# Altium PCB Altium_v03_01_GLUE_LOGIC_4Plane.pcbdoc
Units mil, origin at the board's own origin, x right, y up, seen from the top; angles counter-clockwise.
Board outline 6299.21 x 6299.21 mil, 4 copper layers (Top Layer, GROUND, 5V, Bottom Layer); 46 components, 90 nets, 438 pads, 0 vias.
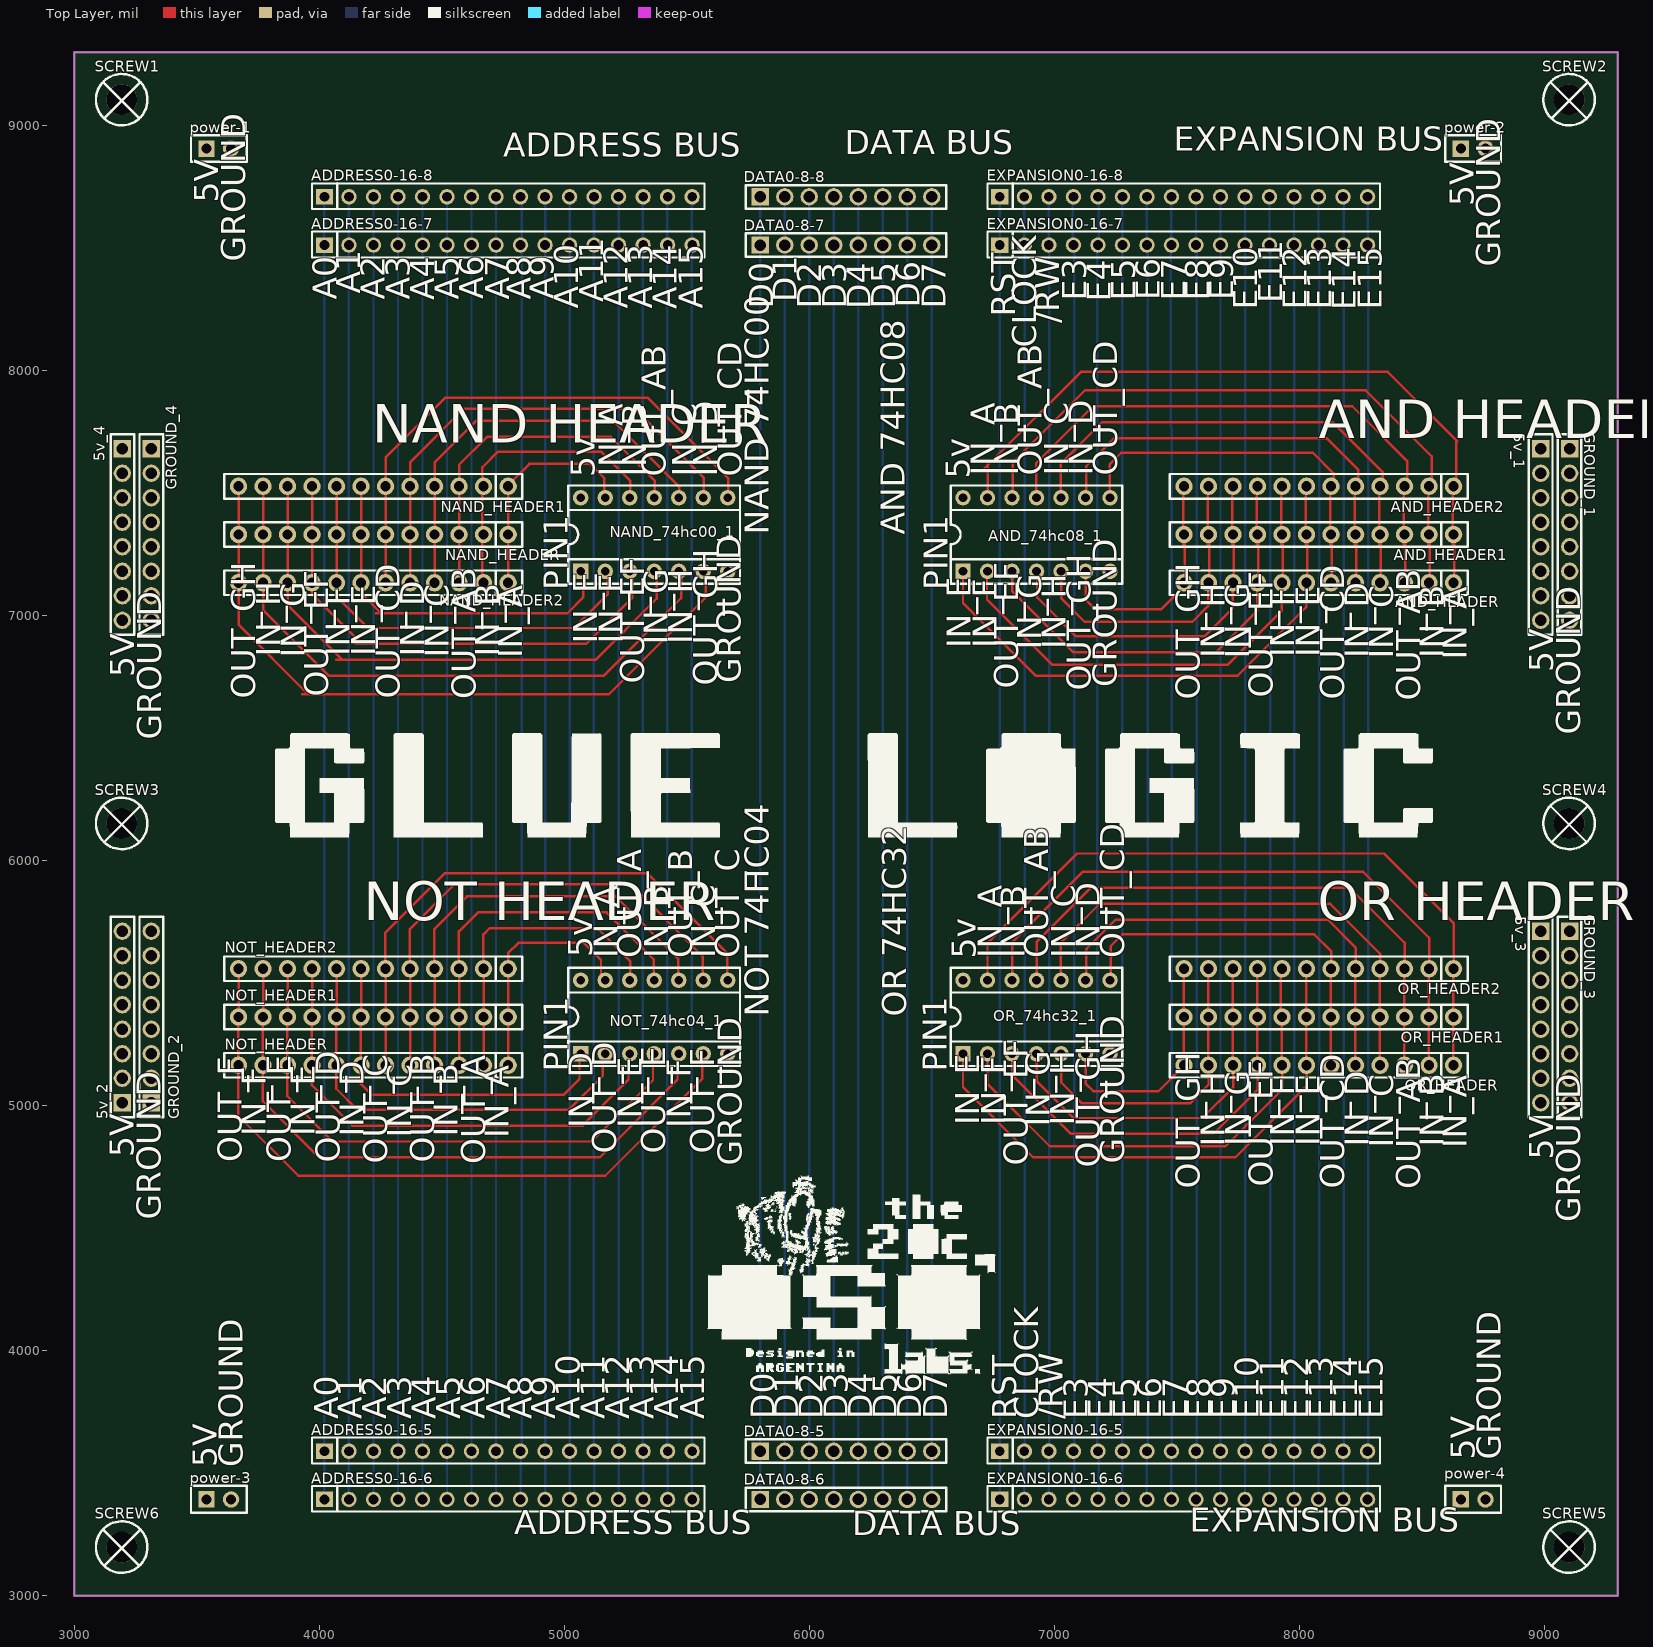
[diagram p0: Top Layer view]
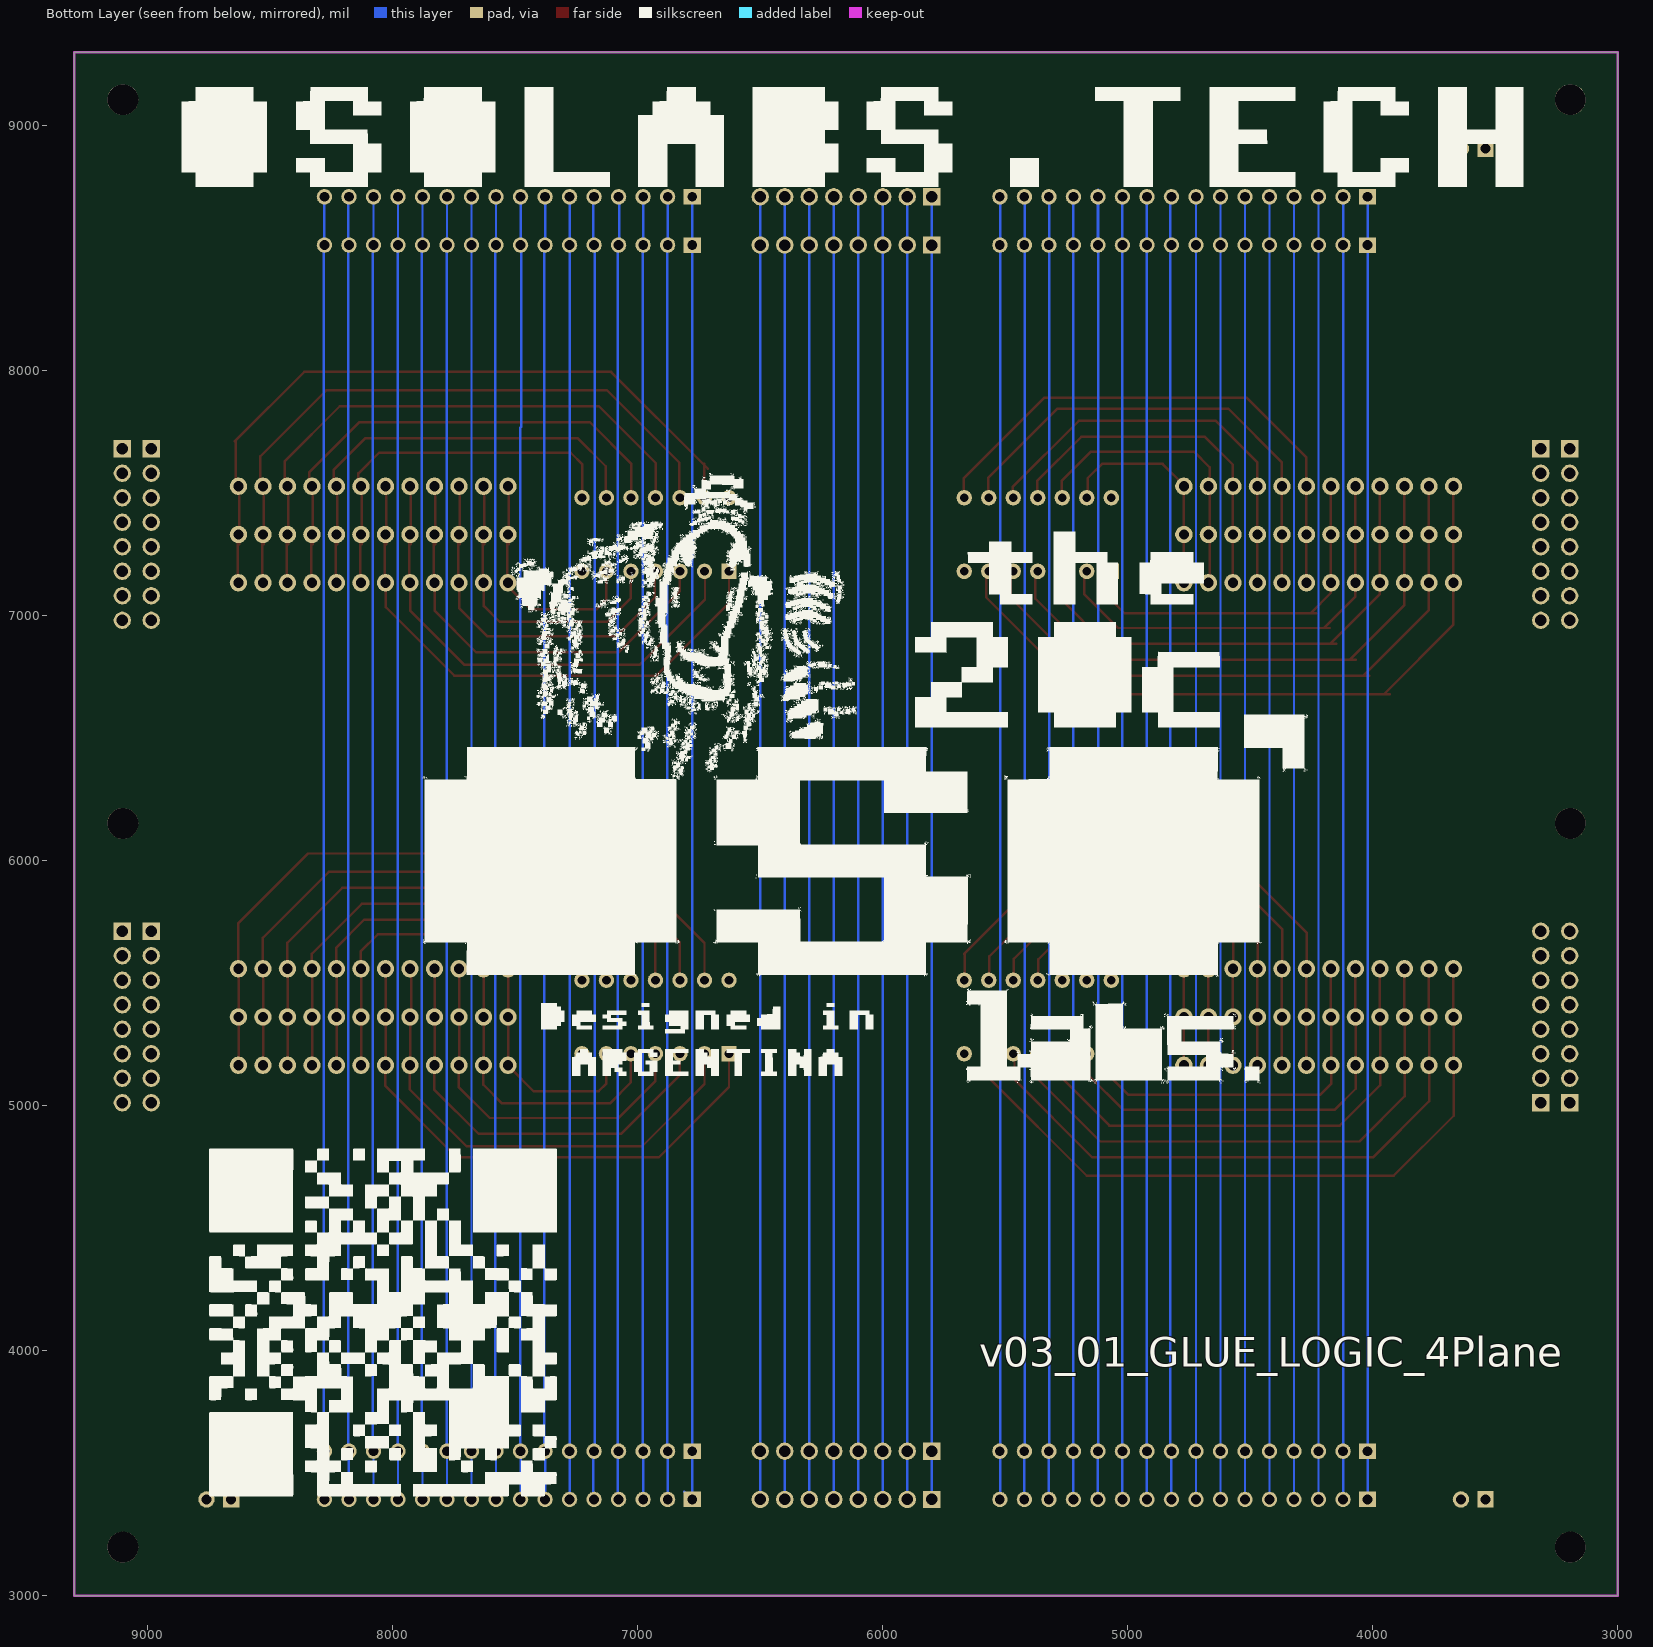
[diagram p1: Bottom Layer view, seen from below]
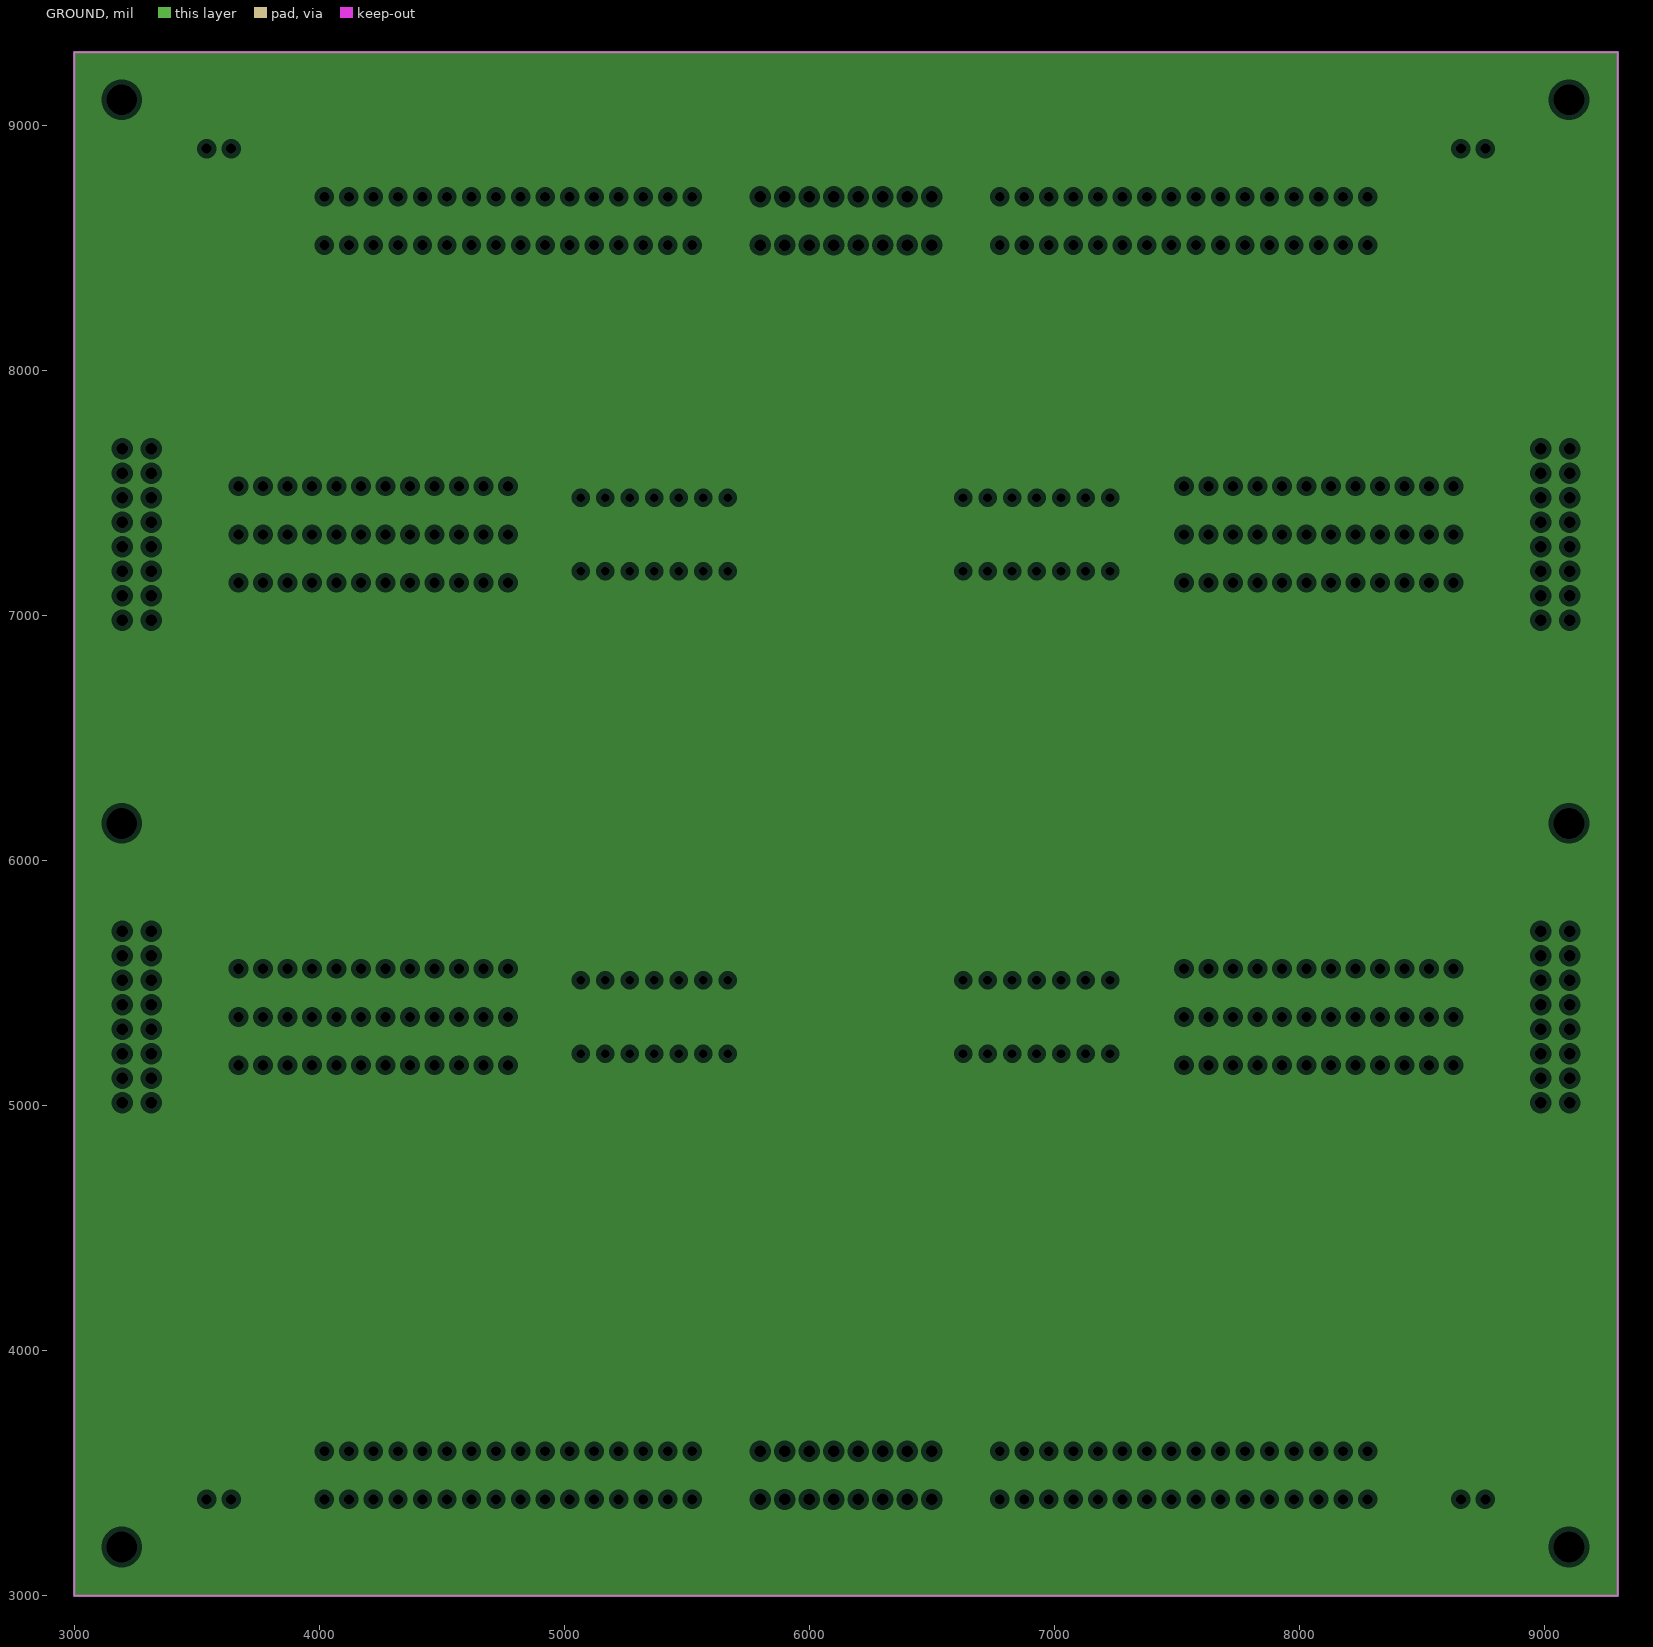
[diagram p2: GROUND, clearances drawn from the general rule]
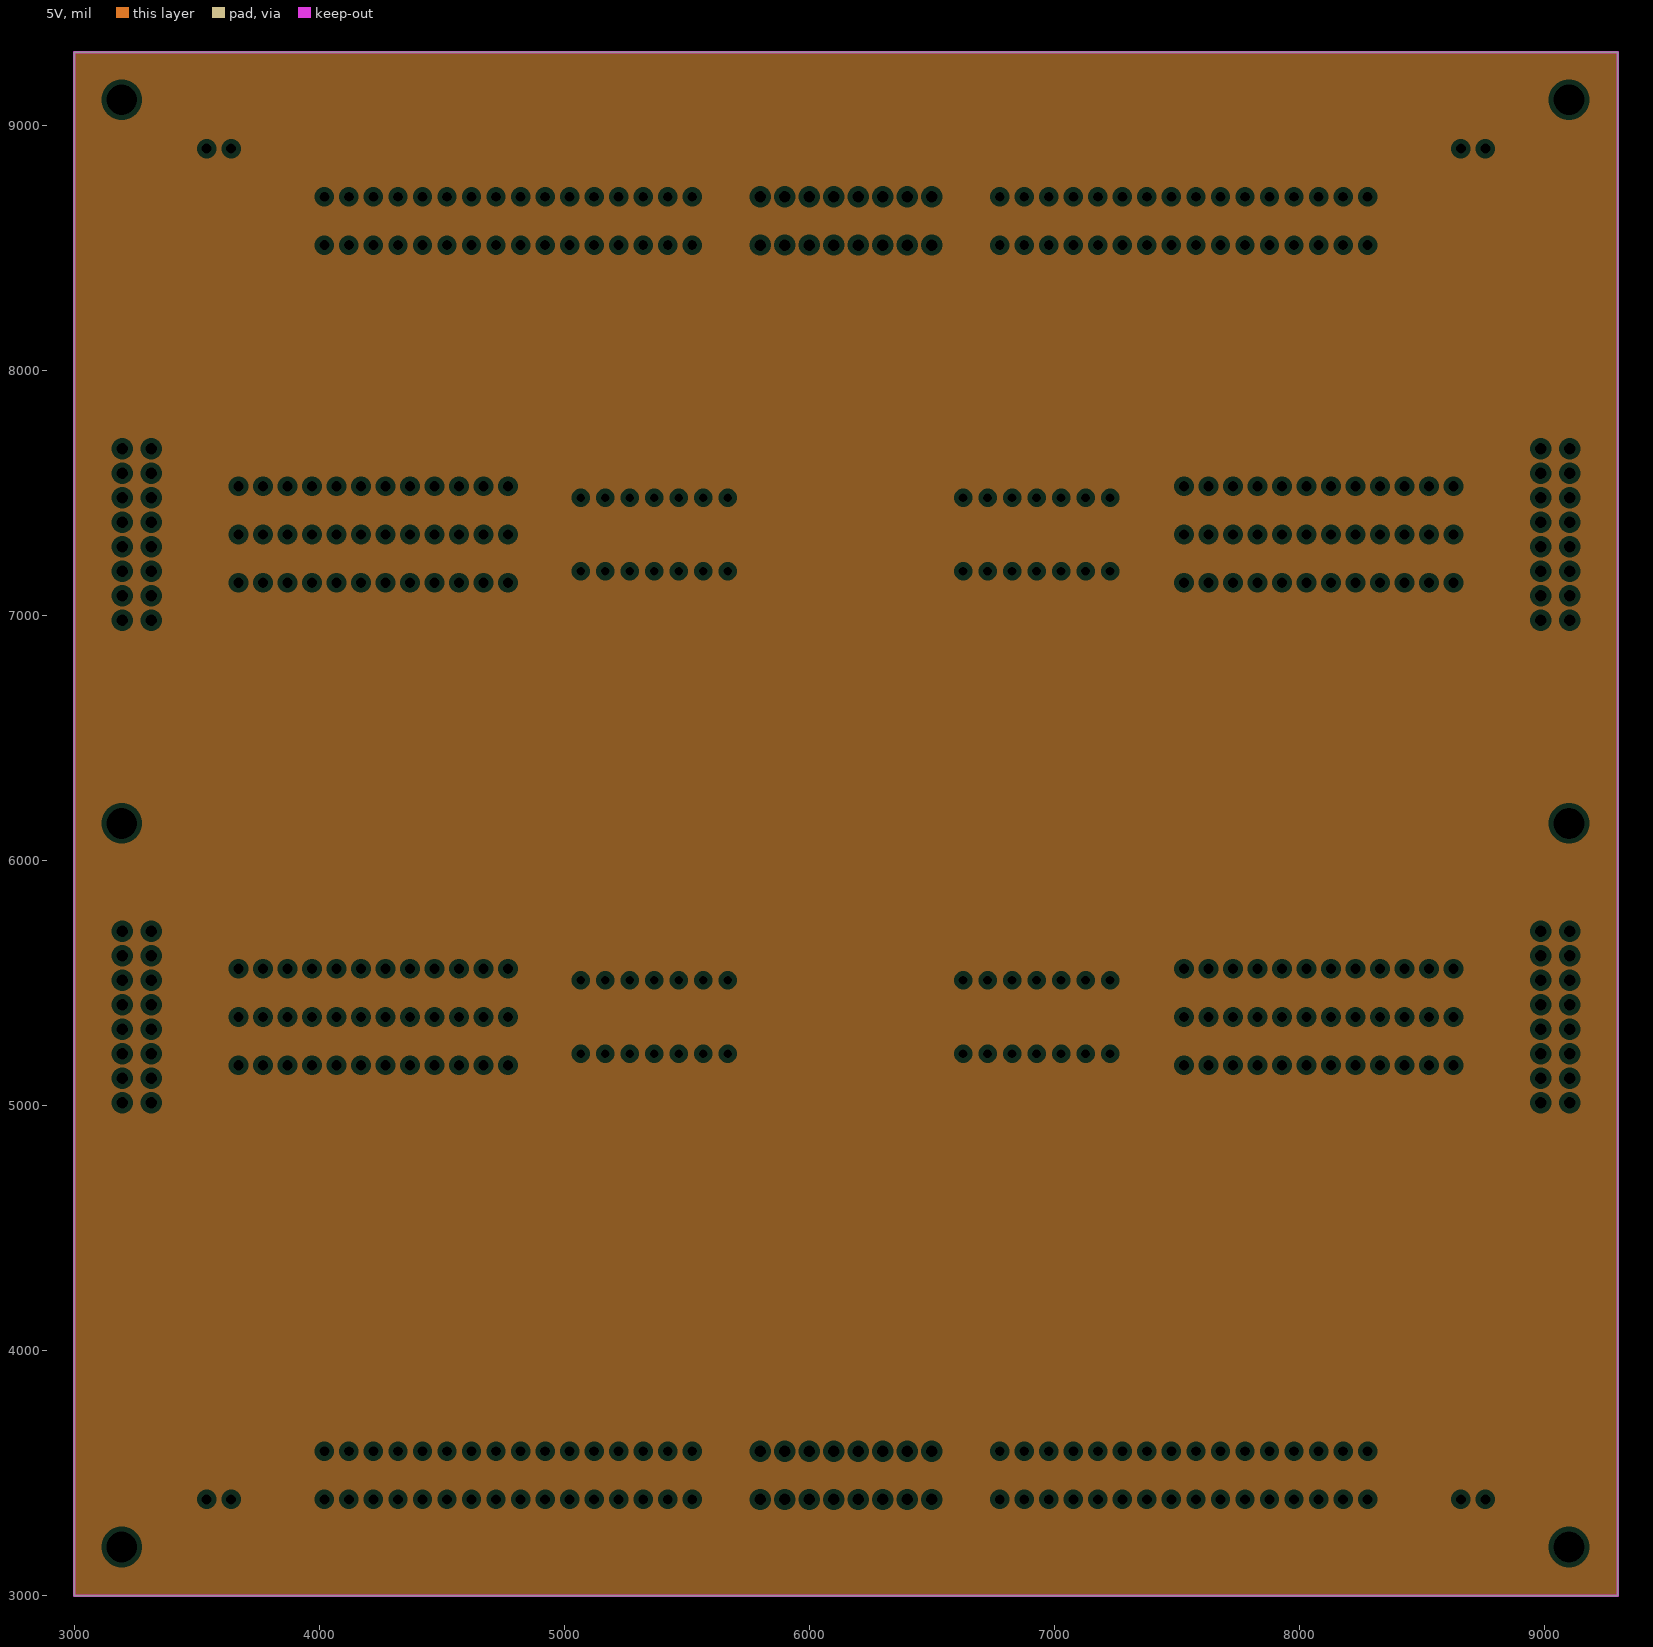
[diagram p3: 5V, clearances drawn from the general rule]

## Layer stack, top to bottom
Top Layer: signal copper (thickness not stored)
Dielectric: dielectric 12.6, FR-4, Dk 4.8
GROUND: plane copper (thickness not stored)
Dielectric: dielectric 12.6, FR-4, Dk 4.8
5V: plane copper (thickness not stored)
Dielectric: dielectric 12.6, FR-4, Dk 4.8
Bottom Layer: signal copper (thickness not stored)

## Board outline
3000,9299.21 9299.21,9299.21 9299.21,3000 3000,3000

## Design rules (kind name [scope] priority, off if disabled: settings)
BoardOutlineClearance copperThickness1oz [All] p0: genericclearance=10 ignorepadtopadclearanceinfootprint=FALSE except(0: Arc-SplitContinuation Track-SplitContinuation SMDPad-SplitContinuation THPad-SplitContinuation Via-SplitContinuation Fill-SplitContinuation Poly-SplitContinuation Region-SplitContinuation Text-SplitContinuation; 6: SMDPad-CutoutEdge THPad-CutoutEdge Via-CutoutEdge Fill-CutoutEdge Region-CutoutEdge; 11.8: Track-OutlineEdge SMDPad-OutlineEdge THPad-OutlineEdge Via-OutlineEdge Fill-OutlineEdge Region-OutlineEdge Poly-OutlineEdge Text-OutlineEdge Track-CutoutEdge)
BoardOutlineClearance copperThickness2oz [All] p0: genericclearance=10 ignorepadtopadclearanceinfootprint=FALSE except(0: Arc-SplitContinuation Track-SplitContinuation SMDPad-SplitContinuation THPad-SplitContinuation Via-SplitContinuation Fill-SplitContinuation Poly-SplitContinuation Region-SplitContinuation Text-SplitContinuation; 6: SMDPad-CutoutEdge THPad-CutoutEdge Via-CutoutEdge Fill-CutoutEdge Region-CutoutEdge; 11.8: Track-OutlineEdge SMDPad-OutlineEdge THPad-OutlineEdge Via-OutlineEdge Fill-OutlineEdge Region-OutlineEdge Poly-OutlineEdge Text-OutlineEdge Track-CutoutEdge)
Clearance copperThickness1oz [(InNet('A0') OR InNet('A1') OR InNet('A2') OR InNet('A3') OR InNet('A4') OR InNet('A5') OR InNet('A6') OR InNet('A7') OR InNet('A8') OR InNet('A9') OR InNet('A10') OR InNet('A11') OR InNet('A12') OR InNet('A13') OR InNet('A14') OR InNet('A15') OR InNet('RST') OR InNet('CLOCK') OR InNet('RW') OR InNet('E5') OR InNet('E6') OR InNet('E7') OR InNet('E8') OR InNet('E9') OR InNet('E10') OR InNet('E11') OR InNet('E12') OR InNet('E13') OR InNet('E14') OR InNet('E15') OR InNet('5V') OR InNet('GROUND') OR InNet('D0') OR InNet('D1') OR InNet('D2') OR InNet('D3') OR InNet('D4') OR InNet('D5') OR InNet('D6') OR InNet('D7') OR InNet('NAND_IN_E') OR InNet('NAND_IN_F') OR InNet('NAND_IN_H') OR InNet('NAND_OUT_GH') OR InNet('NAND_OUT_EF') OR InNet('NAND_IN_G') OR InNet('NAND_OUT_CD') OR InNet('NAND_IN_D') OR InNet('NAND_IN_C') OR InNet('NAND_OUT_AB') OR InNet('NAND_IN_B') OR InNet('NAND_IN_A') OR InNet('AND_IN_E') OR InNet('AND_IN_F') OR InNet('AND_IN_H') OR InNet('AND_OUT_GH') OR InNet('AND_OUT_EF') OR InNet('AND_IN_G') OR InNet('AND_OUT_CD') OR InNet('AND_IN_D') OR InNet('AND_IN_C') OR InNet('AND_OUT_AB') OR InNet('AND_IN_B') OR InNet('AND_IN_A') OR InNet('NOT_IN_D') OR InNet('NOT_OUT_D') OR InNet('NOT_IN_F') OR InNet('NOT_OUT_F') OR InNet('NOT_IN_E') OR InNet('NOT_OUT_E') OR InNet('NOT_OUT_C') OR InNet('NOT_IN_C') OR InNet('NOT_OUT_B') OR InNet('NOT_IN_B') OR InNet('NOT_OUT_A') OR InNet('NOT_IN_A') OR InNet('OR_IN_E') OR InNet('OR_IN_F') OR InNet('OR_IN_H') OR InNet('OR_OUT_GH') OR InNet('OR_OUT_EF') OR InNet('OR_IN_G') OR InNet('OR_OUT_CD') OR InNet('OR_IN_D') OR InNet('OR_IN_C') OR InNet('OR_OUT_AB') OR InNet('OR_IN_B') OR InNet('OR_IN_A') OR InNet('E3') OR InNet('E4'))] p1: gap=7 ignorepadtopadclearanceinfootprint=FALSE except(4: Track-Track; 6: Track-SMDPad SMDPad-SMDPad Track-THPad SMDPad-THPad THPad-THPad Track-Via SMDPad-Via THPad-Via Via-Via Track-Fill SMDPad-Fill THPad-Fill Via-Fill Fill-Fill SMDPad-Region THPad-Region Via-Region Fill-Region Region-Region Track-Poly SMDPad-Poly THPad-Poly Via-Poly Fill-Poly Poly-Poly Track-Text SMDPad-Text THPad-Text Via-Text Fill-Text Region-Text Poly-Text Text-Text Track-Hole SMDPad-Hole THPad-Hole Via-Hole Fill-Hole Region-Hole Poly-Hole Text-Hole; 11.8: Track-Region Region-Poly Track-Sheet SMDPad-Sheet THPad-Sheet Via-Sheet Fill-Sheet Region-Sheet Poly-Sheet Text-Sheet Sheet-Hole)
Clearance copperThickness2oz [All] p1: gap=7 ignorepadtopadclearanceinfootprint=FALSE except(6: Track-SMDPad SMDPad-SMDPad Track-THPad SMDPad-THPad THPad-THPad Track-Via SMDPad-Via THPad-Via Via-Via Track-Fill SMDPad-Fill THPad-Fill Via-Fill Fill-Fill SMDPad-Region THPad-Region Via-Region Fill-Region Region-Region Track-Poly SMDPad-Poly THPad-Poly Via-Poly Fill-Poly Poly-Poly Track-Text SMDPad-Text THPad-Text Via-Text Fill-Text Region-Text Poly-Text Text-Text Track-Hole SMDPad-Hole THPad-Hole Via-Hole Fill-Hole Region-Hole Poly-Hole Text-Hole; 8: Track-Track; 11.8: Track-Region Region-Poly Track-Sheet SMDPad-Sheet THPad-Sheet Via-Sheet Fill-Sheet Region-Sheet Poly-Sheet Text-Sheet Sheet-Hole)
DiffPairsRouting differentialPair [All] p1: maxuncoupledlength=10 minlimit=6 maxlimit=6 mostfreqgap=6 toplayer_minwidth=5 toplayer_prefwidth=10 toplayer_maxwidth=100 bottomlayer_minwidth=5 bottomlayer_prefwidth=10 bottomlayer_maxwidth=100
PasteMaskExpansion pasteMaskExpansion [All] p1: expansion=0
PlaneConnect innerPlane [All] p1: planeconnectstyle=Relief reliefexpansion=20 reliefentries=4 reliefconductorwidth=10 reliefairgap=10
PolygonConnect copperRegion [All] p1: connectstyle=Relief reliefentries=4 reliefconductorwidth=10 polygonreliefangle="90 Angle" airgapwidth=10
RoutingVias viaSize [All] p1: viastyle="Through Hole" holewidth=12.0078 minholewidth=11.811 maxholewidth=248.0314 width=24.0158 minwidth=19.685 maxwidth=393.7008
SolderMaskExpansion solderMaskExpansion [All] p1: useseparateexpansions=TRUE expansion=2 expansionbottom=2
Width copperThickness1oz [All] p1: maxlimit=100 minlimit=5 preferedwidth=10
Width copperThickness2oz [All] p1: maxlimit=100 minlimit=8 preferedwidth=10

## Components (designator, comment, footprint, x,y, rotation, side; value= is the part's Value field where it differs from the comment)
5v_1 "2.54-1*8P母环保" HDR-TH_8P-P2.54-V-F-1 8984.25,7330.71 r270 top
5v_2 "2.54-1*8P母环保" HDR-TH_8P-P2.54-V-F-1 3196.85,5362.2 r90 top
5v_3 "2.54-1*8P母环保" HDR-TH_8P-P2.54-V-F-1 8984.25,5362.2 r270 top
5v_4 "2.54-1*8P母环保" HDR-TH_8P-P2.54-V-F-1 3196.85,7330.71 r270 top
ADDRESS0-16-5 "PM254-1-16-Z-8.5" HDR-TH_16P-P2.54-V-F-A 4771.65,3590.55 r0 top
ADDRESS0-16-6 "PM254-1-16-Z-8.5" HDR-TH_16P-P2.54-V-F-A 4771.65,3393.7 r0 top
ADDRESS0-16-7 "PM254-1-16-Z-8.5" HDR-TH_16P-P2.54-V-F-A 4771.65,8511.81 r0 top
ADDRESS0-16-8 "PM254-1-16-Z-8.5" HDR-TH_16P-P2.54-V-F-A 4771.65,8708.66 r0 top
AND_74hc08_1 "IC-14P窄" DIP-14_L17.8-W10.2-P2.54-BL 6927.01,7330.71 r0 top
AND_HEADER "PM254-1-12-Z-8.5" HDR-TH_12P-P2.54-V-F 8078.74,7133.86 r180 top
AND_HEADER1 "PM254-1-12-Z-8.5" HDR-TH_12P-P2.54-V-F 8078.74,7330.71 r180 top
AND_HEADER2 "PM254-1-12-Z-8.5" HDR-TH_12P-P2.54-V-F 8078.74,7527.56 r180 top
DATA0-8-5 "2.54-1*8P母环保" HDR-TH_8P-P2.54-V-F-1 6149.61,3590.55 r0 top
DATA0-8-6 "2.54-1*8P母环保" HDR-TH_8P-P2.54-V-F-1 6149.61,3393.7 r0 top
DATA0-8-7 "2.54-1*8P母环保" HDR-TH_8P-P2.54-V-F-1 6149.61,8511.81 r0 top
DATA0-8-8 "2.54-1*8P母环保" HDR-TH_8P-P2.54-V-F-1 6149.61,8708.66 r0 top
EXPANSION0-16-5 "PM254-1-16-Z-8.5" HDR-TH_16P-P2.54-V-F-A 7527.56,3590.55 r0 top
EXPANSION0-16-6 "PM254-1-16-Z-8.5" HDR-TH_16P-P2.54-V-F-A 7527.56,3393.7 r0 top
EXPANSION0-16-7 "PM254-1-16-Z-8.5" HDR-TH_16P-P2.54-V-F-A 7527.56,8511.81 r0 top
EXPANSION0-16-8 "PM254-1-16-Z-8.5" HDR-TH_16P-P2.54-V-F-A 7527.56,8708.66 r0 top
GROUND_1 "2.54-1*8P母环保" HDR-TH_8P-P2.54-V-F-1 9102.36,7330.71 r270 top
GROUND_2 "2.54-1*8P母环保" HDR-TH_8P-P2.54-V-F-1 3314.96,5362.2 r90 top
GROUND_3 "2.54-1*8P母环保" HDR-TH_8P-P2.54-V-F-1 9102.36,5362.2 r270 top
GROUND_4 "2.54-1*8P母环保" HDR-TH_8P-P2.54-V-F-1 3314.96,7330.71 r270 top
NAND_74hc00_1 "IC-14P窄" DIP-14_L17.8-W10.2-P2.54-BL 5367.2,7330.71 r0 top
NAND_HEADER "PM254-1-12-Z-8.5" HDR-TH_12P-P2.54-V-F 4221.1,7330.71 r180 top
NAND_HEADER1 "PM254-1-12-Z-8.5" HDR-TH_12P-P2.54-V-F 4221.1,7527.56 r180 top
NAND_HEADER2 "PM254-1-12-Z-8.5" HDR-TH_12P-P2.54-V-F 4221.1,7133.86 r180 top
NOT_74hc04_1 "IC-14P窄" DIP-14_L17.8-W10.2-P2.54-BL 5367.2,5362.2 r0 top
NOT_HEADER "PM254-1-12-Z-8.5" HDR-TH_12P-P2.54-V-F 4221.1,5165.35 r180 top
NOT_HEADER1 "PM254-1-12-Z-8.5" HDR-TH_12P-P2.54-V-F 4221.1,5362.2 r180 top
NOT_HEADER2 "PM254-1-12-Z-8.5" HDR-TH_12P-P2.54-V-F 4221.1,5559.06 r180 top
OR_74hc32_1 "IC-14P窄" DIP-14_L17.8-W10.2-P2.54-BL 6927.01,5362.2 r0 top
OR_HEADER "PM254-1-12-Z-8.5" HDR-TH_12P-P2.54-V-F 8078.74,5165.35 r180 top
OR_HEADER1 "PM254-1-12-Z-8.5" HDR-TH_12P-P2.54-V-F 8078.74,5362.2 r180 top
OR_HEADER2 "PM254-1-12-Z-8.5" HDR-TH_12P-P2.54-V-F 8078.74,5559.06 r180 top
power-1 "2.54-1*2P母" HDR-TH_2P-P2.54-V-F 3590.55,8905.51 r0 top
power-2 "2.54-1*2P母" HDR-TH_2P-P2.54-V-F 8708.66,8905.51 r0 top
power-3 "2.54-1*2P母" HDR-TH_2P-P2.54-V-F 3590.55,3393.7 r0 top
power-4 "2.54-1*2P母" HDR-TH_2P-P2.54-V-F 8708.66,3393.7 r0 top
SCREW1 "Screw-Hole-M3" Screw-Hole-M3 3196.85,9102.36 r0 top
SCREW2 "Screw-Hole-M3" Screw-Hole-M3 9102.36,9102.36 r0 top
SCREW3 "Screw-Hole-M3" Screw-Hole-M3 3196.85,6149.61 r0 top
SCREW4 "Screw-Hole-M3" Screw-Hole-M3 9102.36,6149.61 r0 top
SCREW5 "Screw-Hole-M3" Screw-Hole-M3 9102.36,3196.85 r0 top
SCREW6 "Screw-Hole-M3" Screw-Hole-M3 3196.85,3196.85 r0 top

## Footprints (in the part's own frame and the unit in brackets; to place one, negate y for a bottom-side part, rotate by r counter-clockwise, add the part's x,y. Pads: shape width x height; smd on the part's side, far side on the other; paste and mask are expansions set on the pad)
DIP-14_L17.8-W10.2-P2.54-BL [mil]
  rect 63x63 hole 35.43: 1(-300,-150)
  round 63 hole 35.43: 2(-200,-150) 3(-100,-150) 4(0,-150) 5(100,-150) 6(200,-150) 7(300,-150) 8(300,150) 9(200,150) 10(100,150) 11(0,150) 12(-100,150) 13(-200,150) 14(-300,150)
  silkscreen extent -350,-200 350,200
HDR-TH_2P-P2.54-V-F [mm]
  rect 1.7x1.7 hole 1: 1(-1.27,0)
  round 1.7 hole 1: 2(1.27,0)
  silkscreen extent -2.88,-1.39 2.88,1.4
HDR-TH_8P-P2.54-V-F-1 [mm]
  rect 1.8x1.8 hole 1.2: 1(-8.89,0)
  round 1.8 hole 1.2: 2(-6.35,0) 3(-3.81,0) 4(-1.27,0) 5(1.27,0) 6(3.81,0) 7(6.35,0) 8(8.89,0)
  silkscreen extent -10.41,-1.22 10.41,1.22
HDR-TH_12P-P2.54-V-F [mm]
  round 1.8 hole 1.05: 1(-13.97,0) 2(-11.43,0) 3(-8.89,0) 4(-6.35,0) 5(-3.81,0) 6(-1.27,0) 7(1.27,0) 8(3.81,0) 9(6.35,0) 10(8.89,0) 11(11.43,0) 12(13.97,0)
  silkscreen extent -15.45,-1.27 15.45,1.27
HDR-TH_16P-P2.54-V-F-A [mm]
  rect 1.8x1.6 hole 1: 1(-19.05,0)
  round 1.6 hole 1: 2(-16.51,0) 3(-13.97,0) 4(-11.43,0) 5(-8.89,0) 6(-6.35,0) 7(-3.81,0) 8(-1.27,0) 9(1.27,0) 10(3.81,0) 11(6.35,0) 12(8.89,0) 13(11.43,0) 14(13.97,0) 15(16.51,0) 16(19.05,0)
  silkscreen extent -20.32,-1.27 20.32,1.4
Screw-Hole-M3 [mil]
  round 126 hole 126: 1(-2.5,2.5)
  silkscreen extent -107,-102 102,107

## Nets (pads, with @x,y where several pads share a name; then routed paths per layer and width w, separated by ;. In a path a pad name is that pad's centre, name@x,y a point inside that pad or via, vN(x,y) a via of type N, cw(c..) or ccw(c..) an arc to the next point about the centre after c; other vN are vias at no path point)
5V: 5v_1.1 5v_1.2 5v_1.3 5v_1.4 5v_1.5 5v_1.6 5v_1.7 5v_1.8 5v_2.1 5v_2.2 5v_2.3 5v_2.4 5v_2.5 5v_2.6 5v_2.7 5v_2.8 5v_3.1 5v_3.2 5v_3.3 5v_3.4 5v_3.5 5v_3.6 5v_3.7 5v_3.8 5v_4.1 5v_4.2 5v_4.3 5v_4.4 5v_4.5 5v_4.6 5v_4.7 5v_4.8 AND_74hc08_1.14 NAND_74hc00_1.14 NOT_74hc04_1.14 OR_74hc32_1.14 power-1.1 power-2.1 power-3.1 power-4.1
A0: ADDRESS0-16-5.1 ADDRESS0-16-6.1 ADDRESS0-16-7.1 ADDRESS0-16-8.1 | length 5315
  Bottom Layer w10: ADDRESS0-16-5.1@4020,3589.49 ADDRESS0-16-7.1@4020,8510.75 ; ADDRESS0-16-6.1 ADDRESS0-16-5.1 ; ADDRESS0-16-7.1 ADDRESS0-16-8.1
A1: ADDRESS0-16-5.2 ADDRESS0-16-6.2 ADDRESS0-16-7.2 ADDRESS0-16-8.2 | length 5307
  Bottom Layer w10: ADDRESS0-16-5.2@4120,3584.49 ADDRESS0-16-7.2@4120,8505.75 ; ADDRESS0-16-6.2 ADDRESS0-16-5.2@4121.65,3580.55 ; ADDRESS0-16-7.2 4121.65,8703.66 ADDRESS0-16-8.2@4126.65,8708.66
A2: ADDRESS0-16-5.3 ADDRESS0-16-6.3 ADDRESS0-16-7.3 ADDRESS0-16-8.3 | length 5315
  Bottom Layer w10: ADDRESS0-16-6.3 ADDRESS0-16-5.3 ADDRESS0-16-7.3 ADDRESS0-16-8.3
A3: ADDRESS0-16-5.4 ADDRESS0-16-6.4 ADDRESS0-16-7.4 ADDRESS0-16-8.4 | length 5317
  Bottom Layer w10: ADDRESS0-16-6.4 ADDRESS0-16-7.4 ADDRESS0-16-8.4@4321.65,8703.66 ; ADDRESS0-16-8.4 ADDRESS0-16-8.4@4326.65,8703.66
A4: ADDRESS0-16-5.5 ADDRESS0-16-6.5 ADDRESS0-16-7.5 ADDRESS0-16-8.5 | length 5315
  Bottom Layer w10: ADDRESS0-16-6.5 ADDRESS0-16-7.5 ADDRESS0-16-8.5
A5: ADDRESS0-16-5.6 ADDRESS0-16-6.6 ADDRESS0-16-7.6 ADDRESS0-16-8.6 | length 5317
  Bottom Layer w10: ADDRESS0-16-6.6 ADDRESS0-16-7.6 4521.65,8703.66 ADDRESS0-16-8.6@4526.65,8708.66
A6: ADDRESS0-16-5.7 ADDRESS0-16-6.7 ADDRESS0-16-7.7 ADDRESS0-16-8.7 | length 5315
  Bottom Layer w10: ADDRESS0-16-6.7 ADDRESS0-16-5.7 ADDRESS0-16-7.7 ADDRESS0-16-8.7
A7: ADDRESS0-16-5.8 ADDRESS0-16-6.8 ADDRESS0-16-7.8 ADDRESS0-16-8.8 | length 5317
  Bottom Layer w10: ADDRESS0-16-6.8 ADDRESS0-16-7.8 4721.65,8703.66 ADDRESS0-16-8.8@4726.65,8708.66
A8: ADDRESS0-16-5.9 ADDRESS0-16-6.9 ADDRESS0-16-7.9 ADDRESS0-16-8.9 | length 5317
  Bottom Layer w10: ADDRESS0-16-6.9 ADDRESS0-16-5.9@4821.65,3575.55 ; ADDRESS0-16-8.9 4826.65,8703.66 ADDRESS0-16-5.9@4826.65,3575.55
A9: ADDRESS0-16-5.10 ADDRESS0-16-6.10 ADDRESS0-16-7.10 ADDRESS0-16-8.10 | length 5306.8
  Bottom Layer w10: ADDRESS0-16-6.10 ADDRESS0-16-5.10@4921.65,3575.55 ; ADDRESS0-16-8.10 ADDRESS0-16-7.10 4921.65,3595.55 ADDRESS0-16-5.10@4930,3587.2
A10: ADDRESS0-16-5.11 ADDRESS0-16-6.11 ADDRESS0-16-7.11 ADDRESS0-16-8.11 | length 5315
  Bottom Layer w10: ADDRESS0-16-6.11 ADDRESS0-16-5.11 ADDRESS0-16-7.11 ADDRESS0-16-8.11
A11: ADDRESS0-16-5.12 ADDRESS0-16-6.12 ADDRESS0-16-7.12 ADDRESS0-16-8.12 | length 5515.7
  Bottom Layer w10: ADDRESS0-16-8.12@5120,8738.21 5120,3608.97 ADDRESS0-16-5.12@5121.93,3607.03 ; ADDRESS0-16-6.12 ADDRESS0-16-5.12@5121.65,3580.55 ; ADDRESS0-16-7.12 ADDRESS0-16-8.12
A12: ADDRESS0-16-5.13 ADDRESS0-16-6.13 ADDRESS0-16-7.13 ADDRESS0-16-8.13 | length 5283.7
  Bottom Layer w10: ADDRESS0-16-6.13@5220,3395.35 ADDRESS0-16-6.13 ADDRESS0-16-5.13 5221.65,8478.21 ; ADDRESS0-16-7.13 ADDRESS0-16-8.13
A13: ADDRESS0-16-5.14 ADDRESS0-16-6.14 ADDRESS0-16-7.14 ADDRESS0-16-8.14 | length 5311.7
  Bottom Layer w10: ADDRESS0-16-5.14@5321.65,3565.55 5321.65,3403.7 ADDRESS0-16-6.14@5331.65,3393.7 ; ADDRESS0-16-8.14@5326.65,8708.66 5320,8702.01 5320,3592.2 ADDRESS0-16-5.14@5331.65,3580.55
A14: ADDRESS0-16-5.15 ADDRESS0-16-6.15 ADDRESS0-16-7.15 ADDRESS0-16-8.15 | length 5316.6
  Bottom Layer w10: ADDRESS0-16-6.15 5421.65,3575.55 5419.72,3577.48 5419.72,8706.73 ADDRESS0-16-8.15
A15: ADDRESS0-16-5.16 ADDRESS0-16-6.16 ADDRESS0-16-7.16 ADDRESS0-16-8.16 | length 5316.3
  Bottom Layer w10: ADDRESS0-16-6.16 5520,3395.35 5520,8707.01 ADDRESS0-16-8.16
AND_IN_A: AND_74hc08_1.13 AND_HEADER1.1 AND_HEADER2.1 AND_HEADER.1 | length 2911.5
  Top Layer w10: AND_74hc08_1.13@6707.8,7492.72 6727.8,7512.72 6727.8,7614.21 ; 6712.8,7599.21 6727.8,7614.21 ; 6727.8,7619.21 6727.8,7614.21 ; 8626.1,7290.71 8626.1,7487.56 ; AND_HEADER.1@8631.1,7110.71 AND_HEADER1.1@8631.1,7307.56 ; AND_HEADER2.1@8638.9,7539.57 8638.9,7710.31 ; 8643.9,7710.31 8360,7994.21 7107.8,7994.21 6727.8,7614.21
AND_IN_B: AND_74hc08_1.12 AND_HEADER1.2 AND_HEADER2.2 AND_HEADER.2 | length 2587.6
  Top Layer w10: AND_74hc08_1.12@6807.8,7492.72 6830,7514.92 6830,7624.21 7125,7919.21 8270,7919.21 8538.9,7650.31 AND_HEADER2.2@8538.9,7539.57 ; 8526.1,7290.71 8526.1,7487.56 ; AND_HEADER.2@8531.1,7110.71 AND_HEADER1.2@8531.1,7307.56
AND_IN_C: AND_74hc08_1.10 AND_HEADER1.4 AND_HEADER2.4 AND_HEADER.4 | length 2041.8
  Top Layer w10: AND_74hc08_1.10@7007.8,7492.72 7025,7509.92 7025,7619.21 7195,7789.21 8135,7789.21 8338.9,7585.31 AND_HEADER2.4@8338.9,7539.57 ; 8326.1,7290.71 8326.1,7487.56 ; AND_HEADER.4@8331.1,7110.71 AND_HEADER1.4@8331.1,7307.56
AND_IN_D: AND_74hc08_1.9 AND_HEADER1.5 AND_HEADER2.5 AND_HEADER.5 | length 1785.1
  Top Layer w10: AND_74hc08_1.9@7107.8,7492.72 7130,7514.92 7130,7609.21 7245,7724.21 8110,7724.21 8238.9,7595.31 AND_HEADER2.5@8238.9,7539.57 ; 8226.1,7290.71 8226.1,7487.56 ; AND_HEADER.5@8231.1,7110.71 AND_HEADER1.5@8231.1,7307.56
AND_IN_E: AND_74hc08_1.1 AND_HEADER1.7 AND_HEADER2.7 AND_HEADER.7 | length 2244.3
  Top Layer w10: AND_74hc08_1.1 6627.01,7051 6923.05,6754.96 7748.05,6754.96 8026.95,7033.86 AND_HEADER.7@8026.95,7116.61 ; 8026.1,7290.71 8026.1,7487.56 ; AND_HEADER.7@8031.1,7110.71 AND_HEADER1.7@8031.1,7307.56
AND_IN_F: AND_74hc08_1.2 AND_HEADER1.8 AND_HEADER2.8 AND_HEADER.8 | length 2009.9
  Top Layer w10: AND_74hc08_1.2 6725,7178.7 6725,7065.81 6990.85,6799.96 7708.05,6799.96 7926.95,7018.86 AND_HEADER.8@7926.95,7116.61 ; 7926.1,7290.71 7926.1,7487.56 ; AND_HEADER.8@7931.1,7110.71 AND_HEADER1.8@7931.1,7307.56
AND_IN_G: AND_74hc08_1.4 AND_HEADER1.10 AND_HEADER2.10 AND_HEADER.10 | length 1500
  Top Layer w10: AND_74hc08_1.4 6930,7177.72 6930,7073.01 7088.05,6914.96 7613.05,6914.96 7726.95,7028.86 AND_HEADER.10@7726.95,7116.61 ; 7726.1,7290.71 7726.1,7487.56 ; AND_HEADER.10@7731.1,7110.71 AND_HEADER1.10@7731.1,7307.56
AND_IN_H: AND_74hc08_1.5 AND_HEADER1.11 AND_HEADER2.11 AND_HEADER.11 | length 1247.4
  Top Layer w10: AND_74hc08_1.5 7027.01,7071 7123.05,6974.96 7563.05,6974.96 7626.95,7038.86 AND_HEADER.11@7626.95,7116.61 ; 7626.1,7290.71 7626.1,7487.56 ; AND_HEADER.11@7631.1,7110.71 AND_HEADER1.11@7631.1,7307.56
AND_OUT_AB: AND_74hc08_1.11 AND_HEADER1.3 AND_HEADER2.3 AND_HEADER.3 | length 2323.3
  Top Layer w10: AND_74hc08_1.11@6907.8,7492.72 6925,7509.92 6925,7621.42 7157.8,7854.21 8215,7854.21 8438.9,7630.31 AND_HEADER2.3@8438.9,7539.57 ; 8426.1,7290.71 8426.1,7487.56 ; AND_HEADER.3@8431.1,7110.71 AND_HEADER1.3@8431.1,7307.56
AND_OUT_CD: AND_74hc08_1.8 AND_HEADER1.6 AND_HEADER2.6 AND_HEADER.6 | length 1533.7
  Top Layer w10: AND_74hc08_1.8@7207.8,7492.72 7225,7509.92 7225,7616.42 7272.8,7664.21 8055,7664.21 8138.9,7580.31 AND_HEADER2.6@8138.9,7539.57 ; 8126.1,7290.71 8126.1,7487.56 ; AND_HEADER.6@8131.1,7110.71 AND_HEADER1.6@8131.1,7307.56
AND_OUT_EF: AND_74hc08_1.3 AND_HEADER1.9 AND_HEADER2.9 AND_HEADER.9 | length 1745
  Top Layer w10: AND_74hc08_1.3 6827.01,7101 7078.05,6849.96 7658.05,6849.96 7826.95,7018.86 AND_HEADER.9@7826.95,7116.61 ; 7826.1,7290.71 7826.1,7487.56 ; AND_HEADER.9@7831.1,7110.71 AND_HEADER1.9@7831.1,7307.56
AND_OUT_GH: AND_74hc08_1.6 AND_HEADER1.12 AND_HEADER2.12 AND_HEADER.12 | length 963.3
  Top Layer w10: AND_74hc08_1.6 7127.01,7066 7168.05,7024.96 7435.3,7024.96 AND_HEADER.12@7526.95,7116.61 ; 7526.1,7290.71 7526.1,7487.56 ; AND_HEADER.12@7531.1,7110.71 AND_HEADER1.12@7531.1,7307.56
CLOCK: EXPANSION0-16-5.2 EXPANSION0-16-6.2 EXPANSION0-16-7.2 EXPANSION0-16-8.2 | length 5283.8
  Bottom Layer w10: EXPANSION0-16-6.2 EXPANSION0-16-5.2 ; EXPANSION0-16-8.2 EXPANSION0-16-7.2 6879.49,8509.88 6879.49,3622.48
D0: DATA0-8-5.1 DATA0-8-6.1 DATA0-8-7.1 DATA0-8-8.1 | length 5315
  Bottom Layer w10: DATA0-8-6.1 DATA0-8-5.1 DATA0-8-7.1 DATA0-8-8.1
D1: DATA0-8-5.2 DATA0-8-6.2 DATA0-8-7.2 DATA0-8-8.2 | length 5315
  Bottom Layer w10: DATA0-8-6.2 DATA0-8-5.2 DATA0-8-7.2 DATA0-8-8.2
D2: DATA0-8-5.3 DATA0-8-6.3 DATA0-8-7.3 DATA0-8-8.3 | length 5315
  Bottom Layer w10: DATA0-8-6.3 DATA0-8-5.3 DATA0-8-7.3 DATA0-8-8.3
D3: DATA0-8-5.4 DATA0-8-6.4 DATA0-8-7.4 DATA0-8-8.4 | length 5326.2
  Bottom Layer w10: DATA0-8-6.4@6091.65,3401.65 DATA0-8-6.4 DATA0-8-5.4 DATA0-8-7.4 DATA0-8-8.4
D4: DATA0-8-5.5 DATA0-8-6.5 DATA0-8-7.5 DATA0-8-8.5 | length 5315
  Bottom Layer w10: DATA0-8-6.5 DATA0-8-5.5 DATA0-8-7.5 DATA0-8-8.5
D5: DATA0-8-5.6 DATA0-8-6.6 DATA0-8-7.6 DATA0-8-8.6 | length 5326.2
  Bottom Layer w10: DATA0-8-6.6 DATA0-8-5.6 DATA0-8-7.6 DATA0-8-8.6 ; DATA0-8-6.6@6301.65,3401.65 DATA0-8-6.6@6309.61,3393.7
D6: DATA0-8-5.7 DATA0-8-6.7 DATA0-8-7.7 DATA0-8-8.7 | length 5315
  Bottom Layer w10: DATA0-8-6.7 DATA0-8-5.7 DATA0-8-7.7 DATA0-8-8.7
D7: DATA0-8-5.8 DATA0-8-6.8 DATA0-8-7.8 DATA0-8-8.8 | length 5315
  Bottom Layer w10: DATA0-8-6.8 DATA0-8-5.8 DATA0-8-7.8 DATA0-8-8.8
E3: EXPANSION0-16-5.4 EXPANSION0-16-6.4 EXPANSION0-16-7.4 EXPANSION0-16-8.4 | length 5315
  Bottom Layer w10: EXPANSION0-16-7.4@7075,8505.99 EXPANSION0-16-8.4@7075,8702.84 ; EXPANSION0-16-6.4@7080,3398 EXPANSION0-16-5.4@7080,3594.85 ; EXPANSION0-16-5.4@7080,3597.08 EXPANSION0-16-7.4@7080,8518.34
E4: EXPANSION0-16-5.5 EXPANSION0-16-6.5 EXPANSION0-16-7.5 EXPANSION0-16-8.5 | length 5315
  Bottom Layer w10: EXPANSION0-16-5.5@7175,3592.08 EXPANSION0-16-7.5@7175,8513.34 ; EXPANSION0-16-6.5@7180,3401.54 EXPANSION0-16-5.5@7180,3598.39 ; EXPANSION0-16-7.5@7180,8510.99 EXPANSION0-16-8.5@7180,8707.84
E5: EXPANSION0-16-5.6 EXPANSION0-16-6.6 EXPANSION0-16-7.6 EXPANSION0-16-8.6 | length 5315
  Bottom Layer w10: EXPANSION0-16-6.6 EXPANSION0-16-5.6 EXPANSION0-16-7.6 EXPANSION0-16-8.6
E6: EXPANSION0-16-5.7 EXPANSION0-16-6.7 EXPANSION0-16-7.7 EXPANSION0-16-8.7 | length 5329.5
  Bottom Layer w10: EXPANSION0-16-5.7@7360,3608.11 EXPANSION0-16-5.7 EXPANSION0-16-6.7 ; EXPANSION0-16-7.7@7360,8494.25 EXPANSION0-16-7.7 EXPANSION0-16-8.7 ; EXPANSION0-16-5.7@7380,3608.11 EXPANSION0-16-7.7@7380,8494.25
E7: EXPANSION0-16-5.8 EXPANSION0-16-6.8 EXPANSION0-16-7.8 EXPANSION0-16-8.8 | length 5317.7
  Bottom Layer w10: EXPANSION0-16-7.8@7472.56,8511.81 7475,8509.37 7475,7769.54 7478.35,7766.19 7478.35,3591.34 EXPANSION0-16-5.8 EXPANSION0-16-6.8 ; EXPANSION0-16-7.8 EXPANSION0-16-8.8
E8: EXPANSION0-16-5.9 EXPANSION0-16-6.9 EXPANSION0-16-7.9 EXPANSION0-16-8.9 | length 5283.4
  Bottom Layer w10: EXPANSION0-16-6.9 EXPANSION0-16-5.9 7580,3592.99 7580,8479.21 ; EXPANSION0-16-7.9 EXPANSION0-16-8.9
E9: EXPANSION0-16-5.10 EXPANSION0-16-6.10 EXPANSION0-16-7.10 EXPANSION0-16-8.10 | length 5315
  Bottom Layer w10: EXPANSION0-16-6.10 EXPANSION0-16-5.10 EXPANSION0-16-7.10 EXPANSION0-16-8.10
E10: EXPANSION0-16-5.11 EXPANSION0-16-6.11 EXPANSION0-16-7.11 EXPANSION0-16-8.11 | length 5315.6
  Bottom Layer w10: EXPANSION0-16-6.11 EXPANSION0-16-5.11 7778.35,3591.34 7778.35,8511.02 EXPANSION0-16-7.11 EXPANSION0-16-8.11
E11: EXPANSION0-16-5.12 EXPANSION0-16-6.12 EXPANSION0-16-7.12 EXPANSION0-16-8.12 | length 5317
  Bottom Layer w10: EXPANSION0-16-6.12 EXPANSION0-16-5.12 7880,3592.99 7880,8509.37 EXPANSION0-16-7.12 EXPANSION0-16-8.12
E12: EXPANSION0-16-5.13 EXPANSION0-16-6.13 EXPANSION0-16-7.13 EXPANSION0-16-8.13 | length 5315.6
  Bottom Layer w10: EXPANSION0-16-6.13 EXPANSION0-16-5.13 7978.35,3591.34 7978.35,8511.02 EXPANSION0-16-7.13 EXPANSION0-16-8.13
E13: EXPANSION0-16-5.14 EXPANSION0-16-6.14 EXPANSION0-16-7.14 EXPANSION0-16-8.14 | length 5283.4
  Bottom Layer w10: EXPANSION0-16-6.14 EXPANSION0-16-5.14 8080,3592.99 8080,8479.21 ; EXPANSION0-16-7.14 EXPANSION0-16-8.14
E14: EXPANSION0-16-5.15 EXPANSION0-16-6.15 EXPANSION0-16-7.15 EXPANSION0-16-8.15 | length 5317
  Bottom Layer w10: EXPANSION0-16-6.15 EXPANSION0-16-5.15 8180,3592.99 8180,8706.22 EXPANSION0-16-8.15
E15: EXPANSION0-16-5.16 EXPANSION0-16-6.16 EXPANSION0-16-7.16 EXPANSION0-16-8.16 | length 5284.6
  Bottom Layer w10: EXPANSION0-16-6.16 EXPANSION0-16-5.16 8280,3592.99 EXPANSION0-16-7.16@8280,8480.48 ; EXPANSION0-16-7.16 EXPANSION0-16-8.16
GROUND: AND_74hc08_1.7 GROUND_1.1 GROUND_1.2 GROUND_1.3 GROUND_1.4 GROUND_1.5 GROUND_1.6 GROUND_1.7 GROUND_1.8 GROUND_2.1 GROUND_2.2 GROUND_2.3 GROUND_2.4 GROUND_2.5 GROUND_2.6 GROUND_2.7 GROUND_2.8 GROUND_3.1 GROUND_3.2 GROUND_3.3 GROUND_3.4 GROUND_3.5 GROUND_3.6 GROUND_3.7 GROUND_3.8 GROUND_4.1 GROUND_4.2 GROUND_4.3 GROUND_4.4 GROUND_4.5 GROUND_4.6 GROUND_4.7 GROUND_4.8 NAND_74hc00_1.7 NOT_74hc04_1.7 OR_74hc32_1.7 power-1.2 power-2.2 power-3.2 power-4.2
NAND_IN_A: NAND_74hc00_1.13 NAND_HEADER1.1 NAND_HEADER2.1 NAND_HEADER.1 | length 939
  Top Layer w10: NAND_HEADER1.1@4766.1,7527.56 4857.76,7619.21 5105,7619.21 5163.43,7560.78 5163.43,7494.48 NAND_74hc00_1.13@5177.2,7480.71 ; NAND_HEADER2.1 NAND_HEADER.1 NAND_HEADER1.1
NAND_IN_B: NAND_74hc00_1.12 NAND_HEADER1.2 NAND_HEADER2.2 NAND_HEADER.2 | length 1214.4
  Top Layer w10: NAND_HEADER1.2@4665,7528.66 NAND_HEADER1.2@4666.1,7527.56 ; NAND_HEADER2.2@4666.1,7133.86 4666.1,7330.71 NAND_HEADER1.2@4666.1,7527.56 ; NAND_74hc00_1.12@5270,7487.91 5270,7549.21 5150,7669.21 4730,7669.21 4666.1,7605.31 NAND_HEADER1.2@4666.1,7527.56
NAND_IN_C: NAND_74hc00_1.10 NAND_HEADER1.4 NAND_HEADER2.4 NAND_HEADER.4 | length 1720.7
  Top Layer w10: NAND_HEADER2.4 NAND_HEADER.4 NAND_HEADER1.4 4471.1,7625.31 4640,7794.21 5200,7794.21 5470,7524.21 5470,7492.91 NAND_74hc00_1.10@5482.2,7480.71
NAND_IN_D: NAND_74hc00_1.9 NAND_HEADER1.5 NAND_HEADER2.5 NAND_HEADER.5 | length 1983.9
  Top Layer w10: NAND_HEADER2.5 NAND_HEADER.5 NAND_HEADER1.5 4371.1,7625.31 4590,7844.21 5287.2,7844.21 5570,7561.42 5570,7492.91 NAND_74hc00_1.9@5582.2,7480.71
NAND_IN_E: NAND_74hc00_1.1 NAND_HEADER1.7 NAND_HEADER2.7 NAND_HEADER.7 | length 1533.7
  Top Layer w10: NAND_HEADER1.7 NAND_HEADER.7 NAND_HEADER2.7 4171.1,7093.11 4255,7009.21 ; 4230,7009.21 4255,7009.21 ; NAND_74hc00_1.1@5077.2,7180.71 5077.2,7074.21 5012.2,7009.21 4255,7009.21
NAND_IN_F: NAND_74hc00_1.2 NAND_HEADER1.8 NAND_HEADER2.8 NAND_HEADER.8 | length 1785.1
  Top Layer w10: NAND_HEADER1.8 NAND_HEADER.8 NAND_HEADER2.8 4071.1,7078.11 4200,6949.21 ; 4175,6949.21 4200,6949.21 ; NAND_74hc00_1.2@5177.2,7180.71 5177.2,7086.42 5040,6949.21 4200,6949.21
NAND_IN_G: NAND_74hc00_1.4 NAND_HEADER1.10 NAND_HEADER2.10 NAND_HEADER.10 | length 2323.3
  Top Layer w10: NAND_HEADER1.10 NAND_HEADER.10 NAND_HEADER2.10 3871.1,7043.11 4095,6819.21 ; 4070,6819.21 4095,6819.21 ; NAND_74hc00_1.4@5377.2,7180.71 5377.2,7069.21 5127.2,6819.21 4095,6819.21
NAND_IN_H: NAND_74hc00_1.5 NAND_HEADER1.11 NAND_HEADER2.11 NAND_HEADER.11 | length 2587.6
  Top Layer w10: NAND_HEADER1.11 NAND_HEADER.11 NAND_HEADER2.11 3771.1,7023.11 4040,6754.21 ; 4015,6754.21 4040,6754.21 ; NAND_74hc00_1.5@5477.2,7180.71 5477.2,7071.42 5160,6754.21 4040,6754.21
NAND_OUT_AB: NAND_74hc00_1.11 NAND_HEADER1.3 NAND_HEADER2.3 NAND_HEADER.3 | length 1475.6
  Top Layer w10: NAND_HEADER2.3 NAND_HEADER.3 NAND_HEADER1.3 4571.1,7615.31 4685,7729.21 5190,7729.21 5370,7549.21 5370,7492.91 NAND_74hc00_1.11@5382.2,7480.71
NAND_OUT_CD: NAND_74hc00_1.8 NAND_HEADER1.6 NAND_HEADER2.6 NAND_HEADER.6 | length 2193.1
  Top Layer w10: NAND_HEADER2.6 NAND_HEADER.6 NAND_HEADER1.6 4271.1,7645.31 4515,7889.21 5340,7889.21 5670,7559.21 5670,7514.21
NAND_OUT_EF: NAND_74hc00_1.3 NAND_HEADER1.9 NAND_HEADER2.9 NAND_HEADER.9 | length 2041.8
  Top Layer w10: NAND_HEADER1.9 NAND_HEADER.9 NAND_HEADER2.9 3971.1,7088.11 4175,6884.21 ; 4150,6884.21 4175,6884.21 ; NAND_74hc00_1.3@5277.2,7180.71 5277.2,7071.42 5090,6884.21 4175,6884.21
NAND_OUT_GH: NAND_74hc00_1.6 NAND_HEADER1.12 NAND_HEADER2.12 NAND_HEADER.12 | length 2883.3
  Top Layer w10: NAND_HEADER1.12 NAND_HEADER.12 NAND_HEADER2.12 3671.1,6963.11 3955,6679.21 ; 3930,6679.21 3955,6679.21 ; NAND_74hc00_1.6@5577.2,7180.71 5577.2,7074.21 5182.2,6679.21 3955,6679.21
NOT_IN_A: NOT_74hc04_1.13 NOT_HEADER1.1 NOT_HEADER2.1 NOT_HEADER.1 | length 951.8
  Top Layer w10: NOT_HEADER.1 NOT_HEADER1.1 NOT_HEADER2.1 4771.1,5622.56 4812.76,5664.21 5080,5664.21 5150,5594.21 5150,5527.91 NOT_74hc04_1.13@5152.2,5525.71
NOT_IN_B: NOT_74hc04_1.11 NOT_HEADER1.3 NOT_HEADER2.3 NOT_HEADER.3 | length 1509.8
  Top Layer w10: NOT_HEADER.3@4571.1,5140.71 NOT_HEADER1.3@4571.1,5337.56 ; NOT_HEADER1.3@4571.1,5345.71 NOT_HEADER2.3@4571.1,5542.56 ; NOT_HEADER2.3 4570,5560.16 4570,5711.17 4648.04,5789.21 5173.04,5789.21 5365.24,5597.01 NOT_74hc04_1.11@5365.24,5540.71
NOT_IN_C: NOT_74hc04_1.9 NOT_HEADER1.5 NOT_HEADER2.5 NOT_HEADER.5 | length 2001.5
  Top Layer w10: NOT_HEADER.5 NOT_HEADER1.5 NOT_HEADER2.5@4371.1,5542.56 ; NOT_HEADER2.5 4370,5560.16 4370,5721.17 4553.04,5904.21 5270.24,5904.21 5565.24,5609.21 NOT_74hc04_1.9@5565.24,5540.71
NOT_IN_D: NOT_74hc04_1.1 NOT_HEADER1.7 NOT_HEADER2.7 NOT_HEADER.7 | length 1514.6
  Top Layer w10: NOT_HEADER1.7@4171.1,5345.71 NOT_HEADER1.7 ; NOT_HEADER2.7@4171.1,5542.56 NOT_HEADER1.7 ; NOT_74hc04_1.1@5062.2,5215.71 5062.2,5109.21 4997.2,5044.21 4215,5044.21 4170,5089.21 4170,5361.1 NOT_HEADER1.7
NOT_IN_E: NOT_74hc04_1.3 NOT_HEADER1.9 NOT_HEADER2.9 NOT_HEADER.9 | length 2022.7
  Top Layer w10: NOT_HEADER1.9@3971.1,5345.71 NOT_HEADER1.9 ; NOT_HEADER2.9@3971.1,5542.56 NOT_HEADER1.9 ; NOT_74hc04_1.3@5262.2,5215.71 5262.2,5106.42 5075,4919.21 4135,4919.21 3970,5084.21 3970,5361.1 NOT_HEADER1.9
NOT_IN_F: NOT_74hc04_1.5 NOT_HEADER1.11 NOT_HEADER2.11 NOT_HEADER.11 | length 2568.5
  Top Layer w10: NOT_HEADER1.11@3771.1,5345.71 NOT_HEADER1.11 ; NOT_HEADER2.11@3771.1,5542.56 NOT_HEADER1.11 ; NOT_74hc04_1.5@5462.2,5215.71 5462.2,5106.42 5145,4789.21 4000,4789.21 3770,5019.21 3770,5361.1 NOT_HEADER1.11
NOT_OUT_A: NOT_74hc04_1.12 NOT_HEADER1.2 NOT_HEADER2.2 NOT_HEADER.2 | length 1257.3
  Top Layer w10: NOT_HEADER.2@4671.1,5140.71 NOT_HEADER1.2@4671.1,5337.56 ; NOT_HEADER1.2@4671.1,5345.71 NOT_HEADER2.2@4671.1,5542.56 ; NOT_HEADER2.2 4670,5560.16 4670,5699.21 4695,5724.21 5135,5724.21 5270,5589.21 5270,5543.5 NOT_74hc04_1.12@5262.2,5535.71
NOT_OUT_B: NOT_74hc04_1.10 NOT_HEADER1.4 NOT_HEADER2.4 NOT_HEADER.4 | length 1770.6
  Top Layer w10: NOT_HEADER.4@4471.1,5145.71 NOT_HEADER1.4@4471.1,5342.56 ; NOT_HEADER1.4@4471.1,5345.71 NOT_HEADER2.4@4471.1,5542.56 ; NOT_HEADER2.4 4470,5560.16 4470,5721.17 4603.04,5854.21 5210,5854.21 5465.24,5598.97 NOT_74hc04_1.10@5465.24,5540.71
NOT_OUT_C: NOT_74hc04_1.8 NOT_HEADER1.6 NOT_HEADER2.6 NOT_HEADER.6 | length 2239.8
  Top Layer w10: NOT_HEADER.6 NOT_HEADER1.6 NOT_HEADER2.6@4271.1,5542.56 ; NOT_HEADER2.6 4270,5560.16 4270,5706.17 4513.04,5949.21 5338.04,5949.21 5668.04,5619.21 5665.24,5616.42 NOT_74hc04_1.8@5665.24,5540.71
NOT_OUT_D: NOT_74hc04_1.2 NOT_HEADER1.8 NOT_HEADER2.8 NOT_HEADER.8 | length 1752.4
  Top Layer w10: NOT_HEADER1.8@4066.1,5362.2 NOT_HEADER1.8@4070,5358.31 ; NOT_HEADER1.8@4070,5362.2 NOT_HEADER1.8@4070,5358.31 ; NOT_HEADER1.8 NOT_HEADER2.8@4071.1,5542.56 ; NOT_74hc04_1.2@5157.2,5215.71 5157.2,5121.42 5020,4984.21 4155,4984.21 4070,5069.21 NOT_HEADER1.8@4070,5358.31
NOT_OUT_E: NOT_74hc04_1.4 NOT_HEADER1.10 NOT_HEADER2.10 NOT_HEADER.10 | length 2304.2
  Top Layer w10: NOT_HEADER1.10@3871.1,5345.71 NOT_HEADER1.10 ; NOT_HEADER2.10@3871.1,5542.56 NOT_HEADER1.10 ; NOT_74hc04_1.4@5362.2,5215.71 5362.2,5104.21 5112.2,4854.21 4055,4854.21 3870,5039.21 3870,5361.1 NOT_HEADER1.10
NOT_OUT_F: NOT_74hc04_1.6 NOT_HEADER1.12 NOT_HEADER2.12 NOT_HEADER.12 | length 2864.1
  Top Layer w10: NOT_HEADER2.12 NOT_HEADER1.12 3670,5361.1 3670,4959.21 3915,4714.21 5167.2,4714.21 5562.2,5109.21 NOT_74hc04_1.6@5562.2,5215.71
OR_IN_A: OR_74hc32_1.13 OR_HEADER1.1 OR_HEADER2.1 OR_HEADER.1 | length 2886.7
  Top Layer w10: OR_74hc32_1.13 6727.01,5663.43 7092.8,6029.21 8345,6029.21 8628.9,5745.31 OR_HEADER2.1@8628.9,5574.57 ; OR_HEADER.1@8627.64,5176.85 OR_HEADER1.1@8627.64,5373.7 ; OR_HEADER1.1@8627.64,5386.85 OR_HEADER2.1@8627.64,5583.7
OR_IN_B: OR_74hc32_1.12 OR_HEADER1.2 OR_HEADER2.2 OR_HEADER.2 | length 2591
  Top Layer w10: OR_74hc32_1.12 6827.01,5666.22 7115,5954.21 8260,5954.21 8528.9,5685.31 OR_HEADER2.2@8528.9,5574.57 ; OR_HEADER.2@8527.64,5176.85 OR_HEADER1.2@8527.64,5373.7 ; OR_HEADER1.2@8527.64,5386.85 OR_HEADER2.2@8527.64,5583.7
OR_IN_C: OR_74hc32_1.10 OR_HEADER1.4 OR_HEADER2.4 OR_HEADER.4 | length 2046.9
  Top Layer w10: OR_74hc32_1.10 7025,5514.21 7025,5664.21 7185,5824.21 8125,5824.21 8328.9,5620.31 OR_HEADER2.4@8328.9,5574.57 ; OR_HEADER.4@8327.64,5176.85 OR_HEADER1.4@8327.64,5373.7 ; OR_HEADER1.4@8327.64,5386.85 OR_HEADER2.4@8327.64,5583.7
OR_IN_D: OR_74hc32_1.9 OR_HEADER1.5 OR_HEADER2.5 OR_HEADER.5 | length 1785.1
  Top Layer w10: OR_74hc32_1.9@7112.8,5527.72 7130,5544.92 7130,5639.21 7250,5759.21 8115,5759.21 8230,5644.21 8230,5588.46 OR_HEADER2.5@8243.9,5574.57 ; OR_HEADER.5@8227.64,5176.85 OR_HEADER1.5@8227.64,5373.7 ; OR_HEADER1.5@8227.64,5386.85 OR_HEADER2.5@8227.64,5583.7
OR_IN_E: OR_74hc32_1.1 OR_HEADER1.7 OR_HEADER2.7 OR_HEADER.7 | length 2247.4
  Top Layer w10: OR_74hc32_1.1 6627.01,5076 6913.05,4789.96 7738.05,4789.96 8030,5081.91 8030,5138.56 OR_HEADER.7@8016.95,5151.61 ; OR_HEADER.7@8027.64,5176.85 OR_HEADER1.7@8027.64,5373.7 ; OR_HEADER1.7@8027.64,5386.85 OR_HEADER2.7@8027.64,5583.7
OR_IN_F: OR_74hc32_1.2 OR_HEADER1.8 OR_HEADER2.8 OR_HEADER.8 | length 2011.1
  Top Layer w10: OR_74hc32_1.2 6727.01,5088.8 6980.85,4834.96 7698.05,4834.96 7929.57,5066.48 7929.57,5138.99 OR_HEADER.8@7916.95,5151.61 ; OR_HEADER1.8@7922.64,5386.85 OR_HEADER2.8@7922.64,5583.7 ; OR_HEADER.8@7927.64,5176.85 OR_HEADER1.8@7927.64,5373.7
OR_IN_G: OR_74hc32_1.4 OR_HEADER1.10 OR_HEADER2.10 OR_HEADER.10 | length 1503.2
  Top Layer w10: OR_74hc32_1.4 6927.01,5101 7078.05,4949.96 7603.05,4949.96 7730,5076.91 7730,5138.56 OR_HEADER.10@7716.95,5151.61 ; OR_HEADER.10@7727.64,5176.85 OR_HEADER1.10@7727.64,5373.7 ; OR_HEADER1.10@7727.64,5386.85 OR_HEADER2.10@7727.64,5583.7
OR_IN_H: OR_74hc32_1.5 OR_HEADER1.11 OR_HEADER2.11 OR_HEADER.11 | length 1250.2
  Top Layer w10: OR_74hc32_1.5 7027.01,5096 7113.05,5009.96 7553.05,5009.96 7629.6,5086.51 7629.6,5138.97 OR_HEADER.11@7616.95,5151.61 ; OR_HEADER.11@7627.64,5176.85 OR_HEADER1.11@7627.64,5373.7 ; OR_HEADER1.11@7627.64,5386.85 OR_HEADER2.11@7627.64,5583.7
OR_OUT_AB: OR_74hc32_1.11 OR_HEADER1.3 OR_HEADER2.3 OR_HEADER.3 | length 2326.8
  Top Layer w10: OR_74hc32_1.11 6927.01,5668.43 7147.8,5889.21 8205,5889.21 8428.9,5665.31 OR_HEADER2.3@8428.9,5574.57 ; OR_HEADER.3@8427.64,5176.85 OR_HEADER1.3@8427.64,5373.7 ; OR_HEADER1.3@8427.64,5386.85 OR_HEADER2.3@8427.64,5583.7
OR_OUT_CD: OR_74hc32_1.8 OR_HEADER1.6 OR_HEADER2.6 OR_HEADER.6 | length 1533.7
  Top Layer w10: OR_74hc32_1.8@7212.8,5527.72 7230,5544.92 7230,5651.42 7277.8,5699.21 8060,5699.21 8130,5629.21 8130,5588.46 OR_HEADER2.6@8143.9,5574.57 ; OR_HEADER.6@8127.64,5176.85 OR_HEADER1.6@8127.64,5373.7 ; OR_HEADER1.6@8127.64,5386.85 OR_HEADER2.6@8127.64,5583.7
OR_OUT_EF: OR_74hc32_1.3 OR_HEADER1.9 OR_HEADER2.9 OR_HEADER.9 | length 1748.2
  Top Layer w10: OR_74hc32_1.3 6827.01,5126 7068.05,4884.96 7648.05,4884.96 7830,5066.91 7830,5138.56 OR_HEADER.9@7816.95,5151.61 ; OR_HEADER.9@7827.64,5176.85 OR_HEADER1.9@7827.64,5373.7 ; OR_HEADER1.9@7827.64,5386.85 OR_HEADER2.9@7827.64,5583.7
OR_OUT_GH: OR_74hc32_1.6 OR_HEADER1.12 OR_HEADER2.12 OR_HEADER.12 | length 956.3
  Top Layer w10: OR_74hc32_1.6 7127.01,5091 7158.8,5059.21 7424.55,5059.21 OR_HEADER.12@7516.95,5151.61 ; OR_HEADER.12@7527.64,5176.85 OR_HEADER1.12@7527.64,5373.7 ; OR_HEADER1.12@7527.64,5386.85 OR_HEADER2.12@7527.64,5583.7
RST: EXPANSION0-16-5.1 EXPANSION0-16-6.1 EXPANSION0-16-7.1 EXPANSION0-16-8.1 | length 5360.1
  Bottom Layer w10: EXPANSION0-16-8.1 EXPANSION0-16-7.1 EXPANSION0-16-5.1 EXPANSION0-16-6.1 6809.49,3425.63
RW: EXPANSION0-16-5.3 EXPANSION0-16-6.3 EXPANSION0-16-7.3 EXPANSION0-16-8.3 | length 5283.8
  Bottom Layer w10: EXPANSION0-16-6.3 EXPANSION0-16-5.3 ; EXPANSION0-16-8.3 EXPANSION0-16-7.3 6979.49,8509.88 6979.49,3622.48
pads on no net: SCREW1.1 SCREW2.1 SCREW3.1 SCREW4.1 SCREW5.1 SCREW6.1

## Keep-outs
Board Outline Layer:
  the board outline again, w10

## Silkscreen, mask and mechanical layers (free items; w line width, h text height)
Top Silkscreen Layer:
  drawing of 2972 lines, arcs and shapes, not listed
  text "EXPANSION BUS" at 7487.56,8896.85 h98.43
  text "DATA BUS" at 6144.61,8881.85 h98.43
  text "ADDRESS BUS" at 4751.65,8871.85 h98.43
  text "5V" at 3589.21,8683.41 h98.43 r90
  text "5V" at 8710,8669.21 h98.43 r90
  text "GROUND" at 3699.21,8443.41 h98.43 r90
  text "GROUND" at 8820,8424.21 h98.43 r90
  text "A1" at 4167.38,8313.89 h98.43 r90
  text "A6" at 4669.88,8291.29 h98.43 r90
  text "A9" at 4957.38,8291.29 h98.43 r90
  text "A0" at 4072.38,8288.49 h98.43 r90
  text "A2" at 4267.38,8288.49 h98.43 r90
  text "A3" at 4369.88,8288.49 h98.43 r90
  text "A5" at 4569.88,8288.49 h98.43 r90
  text "A7" at 4774.88,8288.49 h98.43 r90
  text "A8" at 4862.38,8288.49 h98.43 r90
  text "E6" at 7429.88,8286.89 h98.43 r90
  text "E9" at 7729.42,8286.89 h98.43 r90
  text "A4" at 4469.88,8285.69 h98.43 r90
  text "E3" at 7129.42,8284.09 h98.43 r90
  text "E5" at 7329.88,8284.09 h98.43 r90
  text "E7" at 7534.42,8284.09 h98.43 r90
  text "E8" at 7632.38,8284.09 h98.43 r90
  text "E4" at 7229.88,8281.29 h98.43 r90
  text "A11" at 5159.88,8278.19 h98.43 r90
  text "D1" at 5948.63,8277.69 h98.43 r90
  text "E11" at 7929.88,8273.79 h98.43 r90
  text "D6" at 6451.13,8255.09 h98.43 r90
  text "A10" at 5057.38,8252.79 h98.43 r90
  text "A12" at 5259.88,8252.79 h98.43 r90
  text "A13" at 5359.88,8252.79 h98.43 r90
  text "A15" at 5564.88,8252.79 h98.43 r90
  text "D0" at 5853.63,8252.29 h98.43 r90
  text "D2" at 6048.63,8252.29 h98.43 r90
  text "D3" at 6151.13,8252.29 h98.43 r90
  text "D5" at 6351.13,8252.29 h98.43 r90
  text "D7" at 6556.13,8252.29 h98.43 r90
  text "A14" at 5459.88,8249.99 h98.43 r90
  text "D4" at 6251.13,8249.49 h98.43 r90
  text "E10" at 7827.38,8248.39 h98.43 r90
  text "E12" at 8029.88,8248.39 h98.43 r90
  text "E13" at 8129.88,8248.39 h98.43 r90
  text "E15" at 8334.88,8248.39 h98.43 r90
  text "E14" at 8229.88,8245.59 h98.43 r90
  text "RST" at 6840,8220.09 h98.43 r90
  text "/RW" at 7020,8191.79 h98.43 r90
  text "CLOCK" at 6925,8092.19 h98.43 r90
  text "AND HEADER" at 8079.37,7724.41 h157.48
  text "NAND HEADER" at 4216.1,7704.41 h157.48
  text "IN_A" at 6757.32,7571.14 h98.43 r90
  text "IN_B" at 6852.32,7571.14 h98.43 r90
  text "OUT_AB" at 6947.32,7571.14 h98.43 r90
  text "IN_C" at 7057.21,7571.14 h98.43 r90
  text "IN_D" at 7157.21,7571.14 h98.43 r90
  text "OUT_CD" at 7257.32,7571.14 h98.43 r90
  text "IN_A" at 5239.21,7566.36 h98.43 r90
  text "IN_B" at 5334.21,7566.36 h98.43 r90
  text "OUT_AB" at 5414.21,7566.36 h98.43 r90
  text "IN_C" at 5539.1,7566.36 h98.43 r90
  text "IN_D" at 5624.1,7566.36 h98.43 r90
  text "OUT_CD" at 5724.21,7566.36 h98.43 r90
  text "5v" at 5125,7564.21 h98.43 r90
  text "5v" at 6654.21,7557.66 h98.43 r90
  text "NAND 74HC00" at 5834.65,7330.71 h98.43 r90
  text "AND 74HC08" at 6389.57,7330.71 h98.43 r90
  text "PIN1" at 5015,7104.21 h98.43 r90
  text "PIN1" at 6565,7104.21 h98.43 r90
  text "IN_E" at 5134.21,6885.81 h98.43 r90
  text "IN_F" at 5239.21,6885.81 h98.43 r90
  text "IN_H" at 5521.71,6883.01 h98.43 r90
  text "IN_G" at 5421.71,6880.21 h98.43 r90
  text "IN_E" at 6659.21,6865.81 h98.43 r90
  text "IN_F" at 6764.21,6865.81 h98.43 r90
  text "IN_H" at 7046.71,6863.01 h98.43 r90
  text "IN_G" at 6946.71,6860.21 h98.43 r90
  text "IN_F" at 4124.49,6834.06 h98.43 r90
  text "IN_E" at 4229.49,6834.06 h98.43 r90
  text "IN_H" at 3841.99,6831.26 h98.43 r90
  text "IN_D" at 4429.49,6831.26 h98.43 r90
  text "IN_B" at 4734.37,6831.26 h98.43 r90
  text "IN_F" at 7977.76,6829.06 h98.43 r90
  text "IN_E" at 8082.76,6829.06 h98.43 r90
  text "IN_G" at 3941.99,6828.46 h98.43 r90
  text "IN_C" at 4529.49,6828.46 h98.43 r90
  text "IN_A" at 4829.37,6825.56 h98.43 r90
  text "IN_H" at 7695.26,6826.26 h98.43 r90
  text "IN_D" at 8282.76,6826.26 h98.43 r90
  text "IN_B" at 8587.64,6826.26 h98.43 r90
  text "IN_G" at 7795.26,6823.46 h98.43 r90
  text "IN_C" at 8382.76,6823.46 h98.43 r90
  text "IN_A" at 8682.64,6820.56 h98.43 r90
  text "5V" at 9035,6769.21 h98.43 r90
  text "5V" at 3245,6749.21 h98.43 r90
  text "GROUND" at 5719.21,6723.41 h98.43 r90
  text "OUT_EF" at 5326.71,6721.21 h98.43 r90
  text "OUT_GH" at 5624.21,6712.81 h98.43 r90
  text "GROUND" at 7254.21,6708.41 h98.43 r90
  text "OUT_EF" at 6851.71,6701.21 h98.43 r90
  text "OUT_GH" at 7149.21,6692.81 h98.43 r90
  text "OUT_EF" at 4036.99,6669.46 h98.43 r90
  text "OUT_EF" at 7890.26,6664.46 h98.43 r90
  text "OUT_GH" at 3739.49,6661.06 h98.43 r90
  text "OUT_CD" at 4329.37,6661.06 h98.43 r90
  text "OUT_AB" at 4639.37,6658.16 h98.43 r90
  text "OUT_GH" at 7592.76,6656.06 h98.43 r90
  text "OUT_CD" at 8182.64,6656.06 h98.43 r90
  text "OUT_AB" at 8492.64,6653.16 h98.43 r90
  text "GROUND" at 9145,6514.21 h98.43 r90
  text "GROUND" at 3355,6494.21 h98.43 r90
  text "NOT HEADER" at 4181.1,5755.91 h157.48
  text "OR HEADER" at 8074.37,5755.91 h157.48
  text "5v" at 5114.21,5605.06 h98.43 r90
  text "IN_A" at 5217.32,5601.91 h98.43 r90
  text "OUT_A" at 5315,5601.91 h98.43 r90
  text "IN_B" at 5425.37,5601.91 h98.43 r90
  text "OUT_B" at 5523.05,5601.91 h98.43 r90
  text "IN_C" at 5615.37,5601.91 h98.43 r90
  text "OUT_C" at 5713.05,5601.91 h98.43 r90
  text "IN_A" at 6784.21,5601.36 h98.43 r90
  text "IN_B" at 6879.21,5601.36 h98.43 r90
  text "OUT_AB" at 6974.21,5601.36 h98.43 r90
  text "IN_C" at 7084.1,5601.36 h98.43 r90
  text "IN_D" at 7184.1,5601.36 h98.43 r90
  text "OUT_CD" at 7284.21,5601.36 h98.43 r90
  text "5v" at 6680,5599.21 h98.43 r90
  text "NOT 74HC04" at 5834.65,5362.2 h98.43 r90
  text "OR 74HC32" at 6394.57,5362.2 h98.43 r90
  text "PIN1" at 5015,5139.21 h98.43 r90
  text "PIN1" at 6560,5139.21 h98.43 r90
  text "IN_E" at 6694.21,4920.81 h98.43 r90
  text "IN_F" at 6799.21,4920.81 h98.43 r90
  text "IN_H" at 7081.71,4918.01 h98.43 r90
  text "IN_G" at 6981.71,4915.21 h98.43 r90
  text "IN_D" at 5115.37,4909.09 h98.43 r90
  text "IN_E" at 5315.37,4909.09 h98.43 r90
  text "IN_F" at 5515.37,4909.09 h98.43 r90
  text "IN_F" at 3781.32,4875.56 h98.43 r90
  text "IN_E" at 3981.32,4875.56 h98.43 r90
  text "IN_D" at 4181.32,4872.76 h98.43 r90
  text "IN_B" at 4566.32,4872.76 h98.43 r90
  text "IN_C" at 4376.32,4869.96 h98.43 r90
  text "IN_A" at 4774.37,4867.06 h98.43 r90
  text "IN_F" at 7978.41,4834.76 h98.43 r90
  text "IN_E" at 8083.41,4834.76 h98.43 r90
  text "IN_G" at 7795,4834.21 h98.43 r90
  text "IN_H" at 7695.91,4831.96 h98.43 r90
  text "IN_D" at 8283.41,4831.96 h98.43 r90
  text "IN_B" at 8588.29,4831.96 h98.43 r90
  text "IN_C" at 8383.41,4829.16 h98.43 r90
  text "IN_A" at 8683.29,4826.26 h98.43 r90
  text "OUT_D" at 5213.05,4804.76 h98.43 r90
  text "OUT_E" at 5413.05,4804.76 h98.43 r90
  text "OUT_F" at 5613.05,4804.76 h98.43 r90
  text "5V" at 3244.21,4789.51 h98.43 r90
  text "5V" at 9035,4779.21 h98.43 r90
  text "OUT_F" at 3683.64,4769.26 h98.43 r90
  text "OUT_E" at 3883.64,4769.26 h98.43 r90
  text "OUT_D" at 4083.64,4766.46 h98.43 r90
  text "OUT_B" at 4468.64,4766.46 h98.43 r90
  text "OUT_C" at 4278.64,4763.66 h98.43 r90
  text "GROUND" at 7284.21,4763.41 h98.43 r90
  text "OUT_A" at 4676.69,4760.76 h98.43 r90
  text "OUT_EF" at 6891.71,4756.21 h98.43 r90
  text "GROUND" at 5725,4754.21 h98.43 r90
  text "OUT_GH" at 7184.21,4747.81 h98.43 r90
  text "OUT_EF" at 7890.91,4670.16 h98.43 r90
  text "OUT_GH" at 7593.41,4661.76 h98.43 r90
  text "OUT_CD" at 8183.29,4661.76 h98.43 r90
  text "OUT_AB" at 8493.29,4658.86 h98.43 r90
  text "GROUND" at 3354.21,4534.51 h98.43 r90
  text "GROUND" at 9145,4524.21 h98.43 r90
  text "A0" at 4077.96,3720.16 h98.43 r90
  text "A1" at 4172.96,3720.16 h98.43 r90
  text "A2" at 4272.96,3720.16 h98.43 r90
  text "A3" at 4375.46,3720.16 h98.43 r90
  text "A4" at 4475.46,3720.16 h98.43 r90
  text "A5" at 4575.46,3720.16 h98.43 r90
  text "A6" at 4675.46,3720.16 h98.43 r90
  text "A7" at 4780.46,3720.16 h98.43 r90
  text "A8" at 4867.96,3720.16 h98.43 r90
  text "A9" at 4962.96,3720.16 h98.43 r90
  text "A10" at 5062.96,3720.16 h98.43 r90
  text "A11" at 5165.46,3720.16 h98.43 r90
  text "A12" at 5265.46,3720.16 h98.43 r90
  text "A13" at 5365.46,3720.16 h98.43 r90
  text "A14" at 5465.46,3720.16 h98.43 r90
  text "A15" at 5570.46,3720.16 h98.43 r90
  text "D0" at 5859.21,3720.16 h98.43 r90
  text "D1" at 5954.21,3720.16 h98.43 r90
  text "D2" at 6054.21,3720.16 h98.43 r90
  text "D3" at 6156.71,3720.16 h98.43 r90
  text "D4" at 6256.71,3720.16 h98.43 r90
  text "D5" at 6356.71,3720.16 h98.43 r90
  text "D6" at 6456.71,3720.16 h98.43 r90
  text "D7" at 6561.71,3720.16 h98.43 r90
  text "RST" at 6845,3720.16 h98.43 r90
  text "CLOCK" at 6935,3720.16 h98.43 r90
  text "/RW" at 7032.96,3720.16 h98.43 r90
  text "E3" at 7135,3720.16 h98.43 r90
  text "E4" at 7235.46,3720.16 h98.43 r90
  text "E5" at 7335.46,3720.16 h98.43 r90
  text "E6" at 7435.46,3720.16 h98.43 r90
  text "E7" at 7540,3720.16 h98.43 r90
  text "E8" at 7637.96,3720.16 h98.43 r90
  text "E9" at 7735,3720.16 h98.43 r90
  text "E10" at 7832.96,3720.16 h98.43 r90
  text "E11" at 7935.46,3720.16 h98.43 r90
  text "E12" at 8035.46,3720.16 h98.43 r90
  text "E13" at 8135.46,3720.16 h98.43 r90
  text "E14" at 8235.46,3720.16 h98.43 r90
  text "E15" at 8340.46,3720.16 h98.43 r90
  text "5V" at 8715.37,3556.61 h98.43 r90
  text "GROUND" at 8820.37,3556.61 h98.43 r90
  text "5V" at 3582.26,3525.5 h98.43 r90
  text "GROUND" at 3687.26,3525.5 h98.43 r90
  text "EXPANSION BUS" at 7552.56,3261.85 h98.43
  text "ADDRESS BUS" at 4796.65,3251.85 h98.43
  text "DATA BUS" at 6174.61,3246.85 h98.43
Bottom Silkscreen Layer:
  drawing of 3046 lines, arcs and shapes, not listed
  text "v03_01_GLUE_LOGIC_4Plane" at 5605,3934.21 h120